# Altium PCB REV11_PCB_DESIGN_LAYOUT.PcbDoc (part 1 of 3)
Units mm, origin at the board's own origin, x right, y up, seen from the top; angles counter-clockwise.
Board outline 97.79 x 93.98 mm, 4 copper layers (L1S-TOP, L2- GND PLANE, L3 - PWR PLANE, L4-BOTTOM), stack 1.636 mm thick; 53 components, 27 nets, 164 pads, 437 vias.
Unrouted connection lines stored in the file: 146.
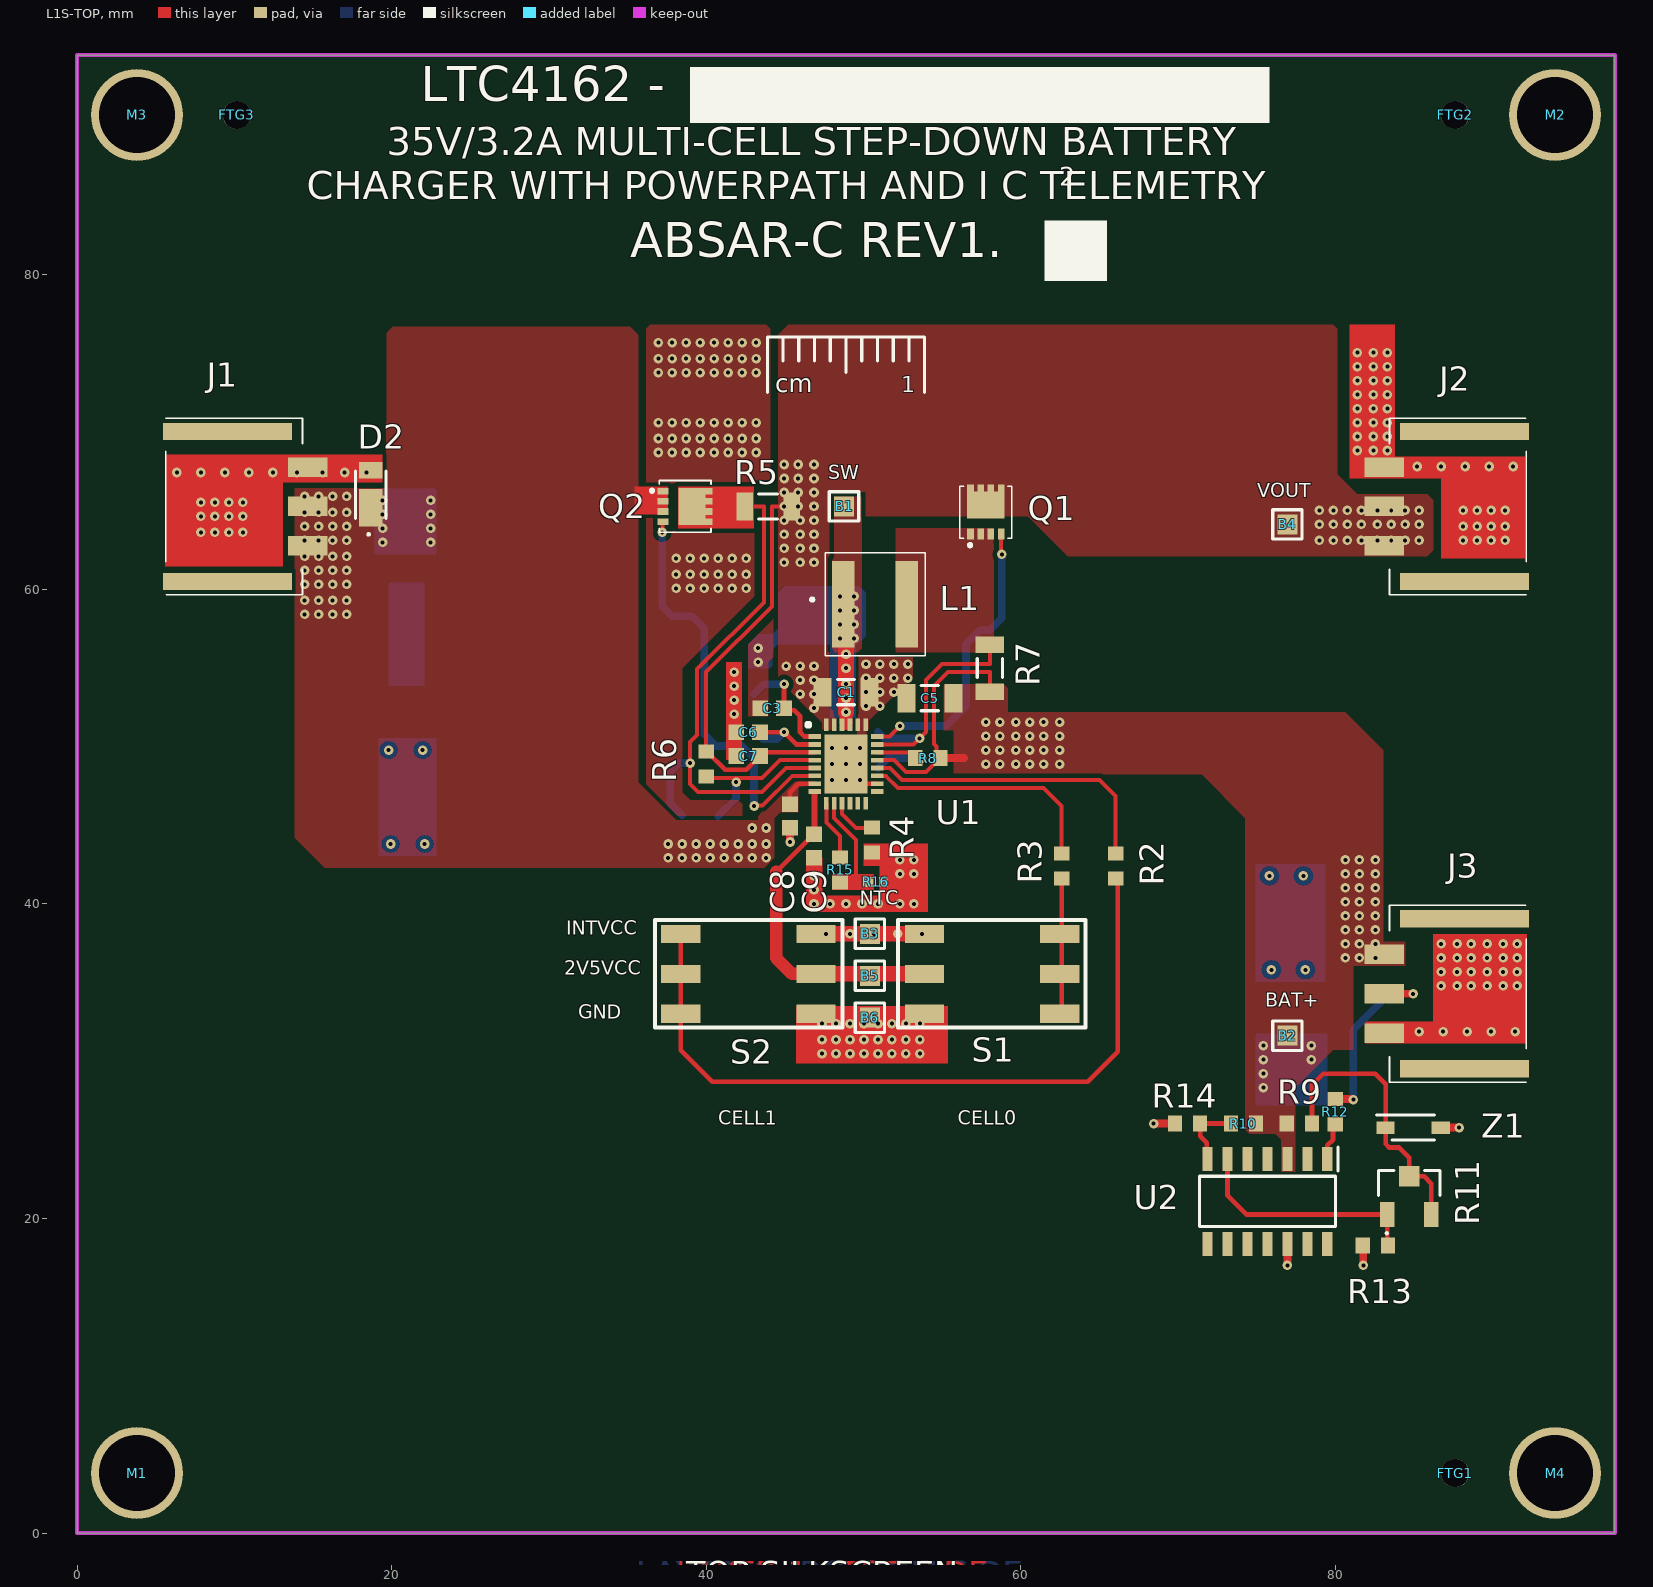
[diagram p0: L1S-TOP view]
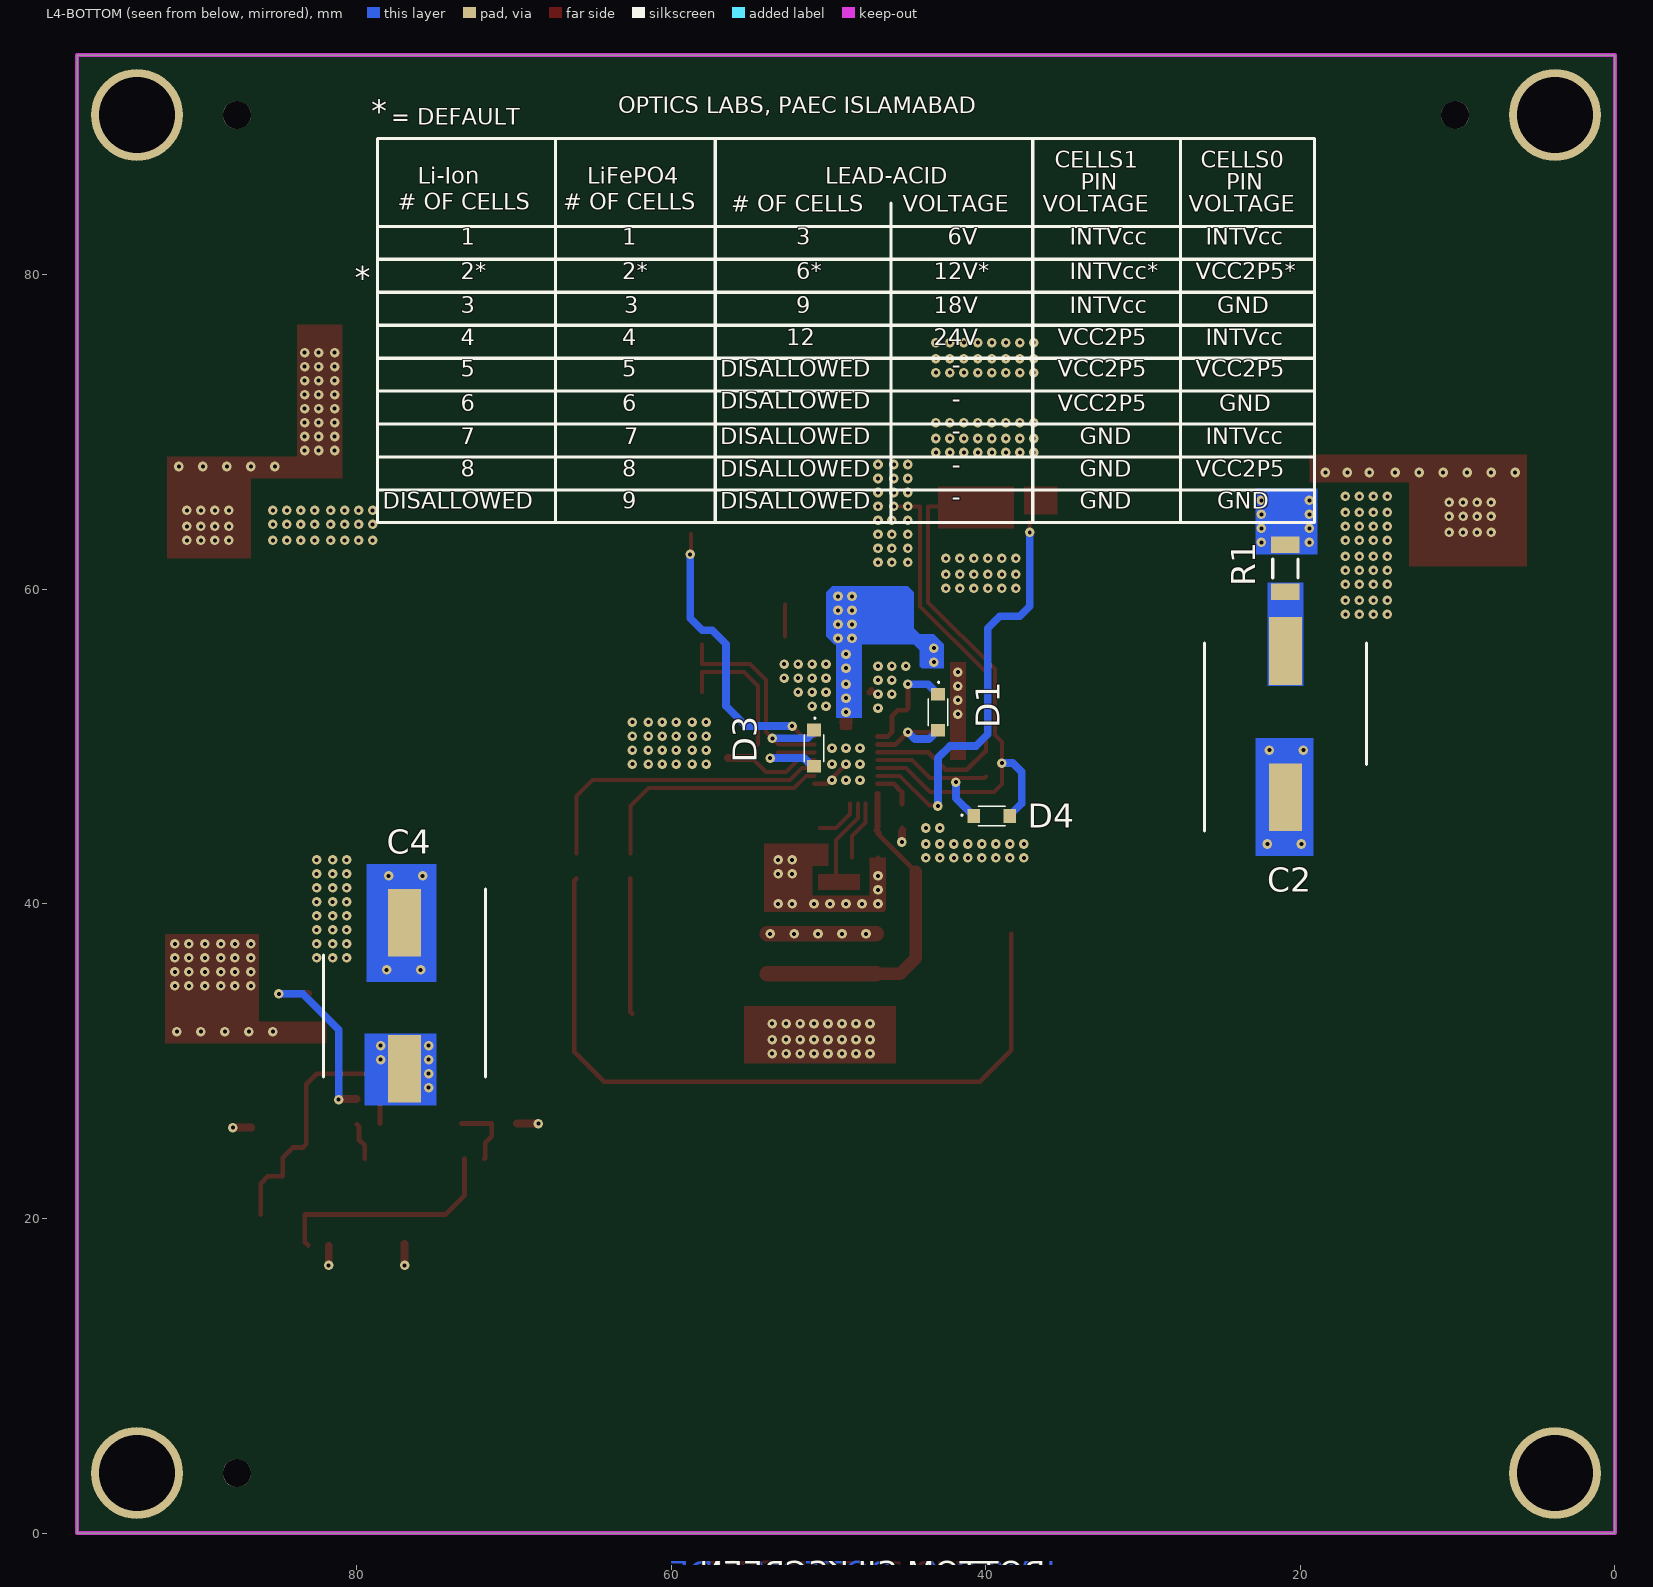
[diagram p1: L4-BOTTOM view, seen from below]
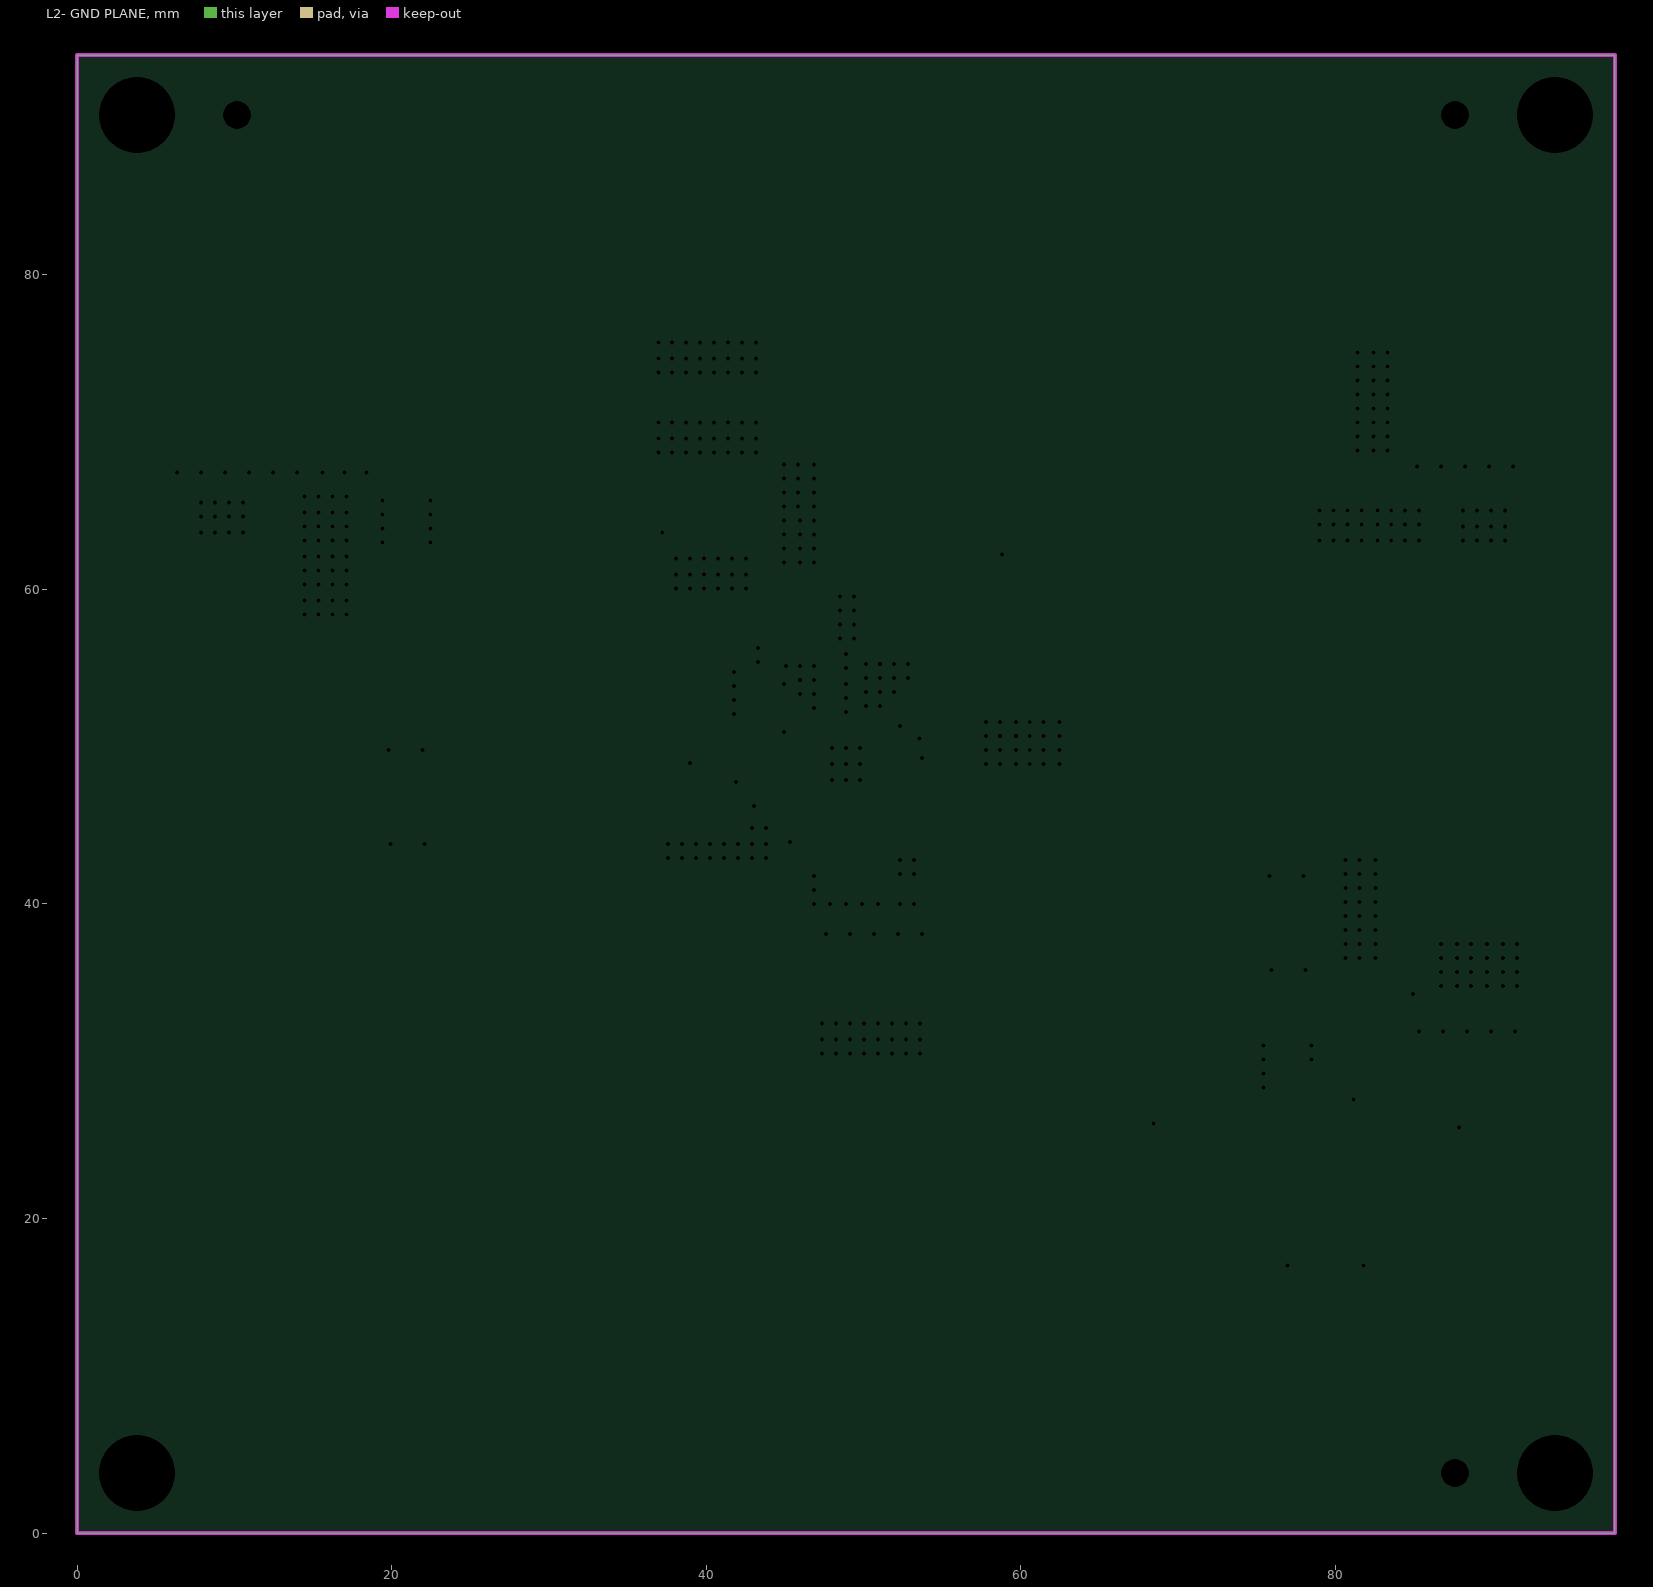
[diagram p2: L2- GND PLANE, clearances drawn from the general rule]
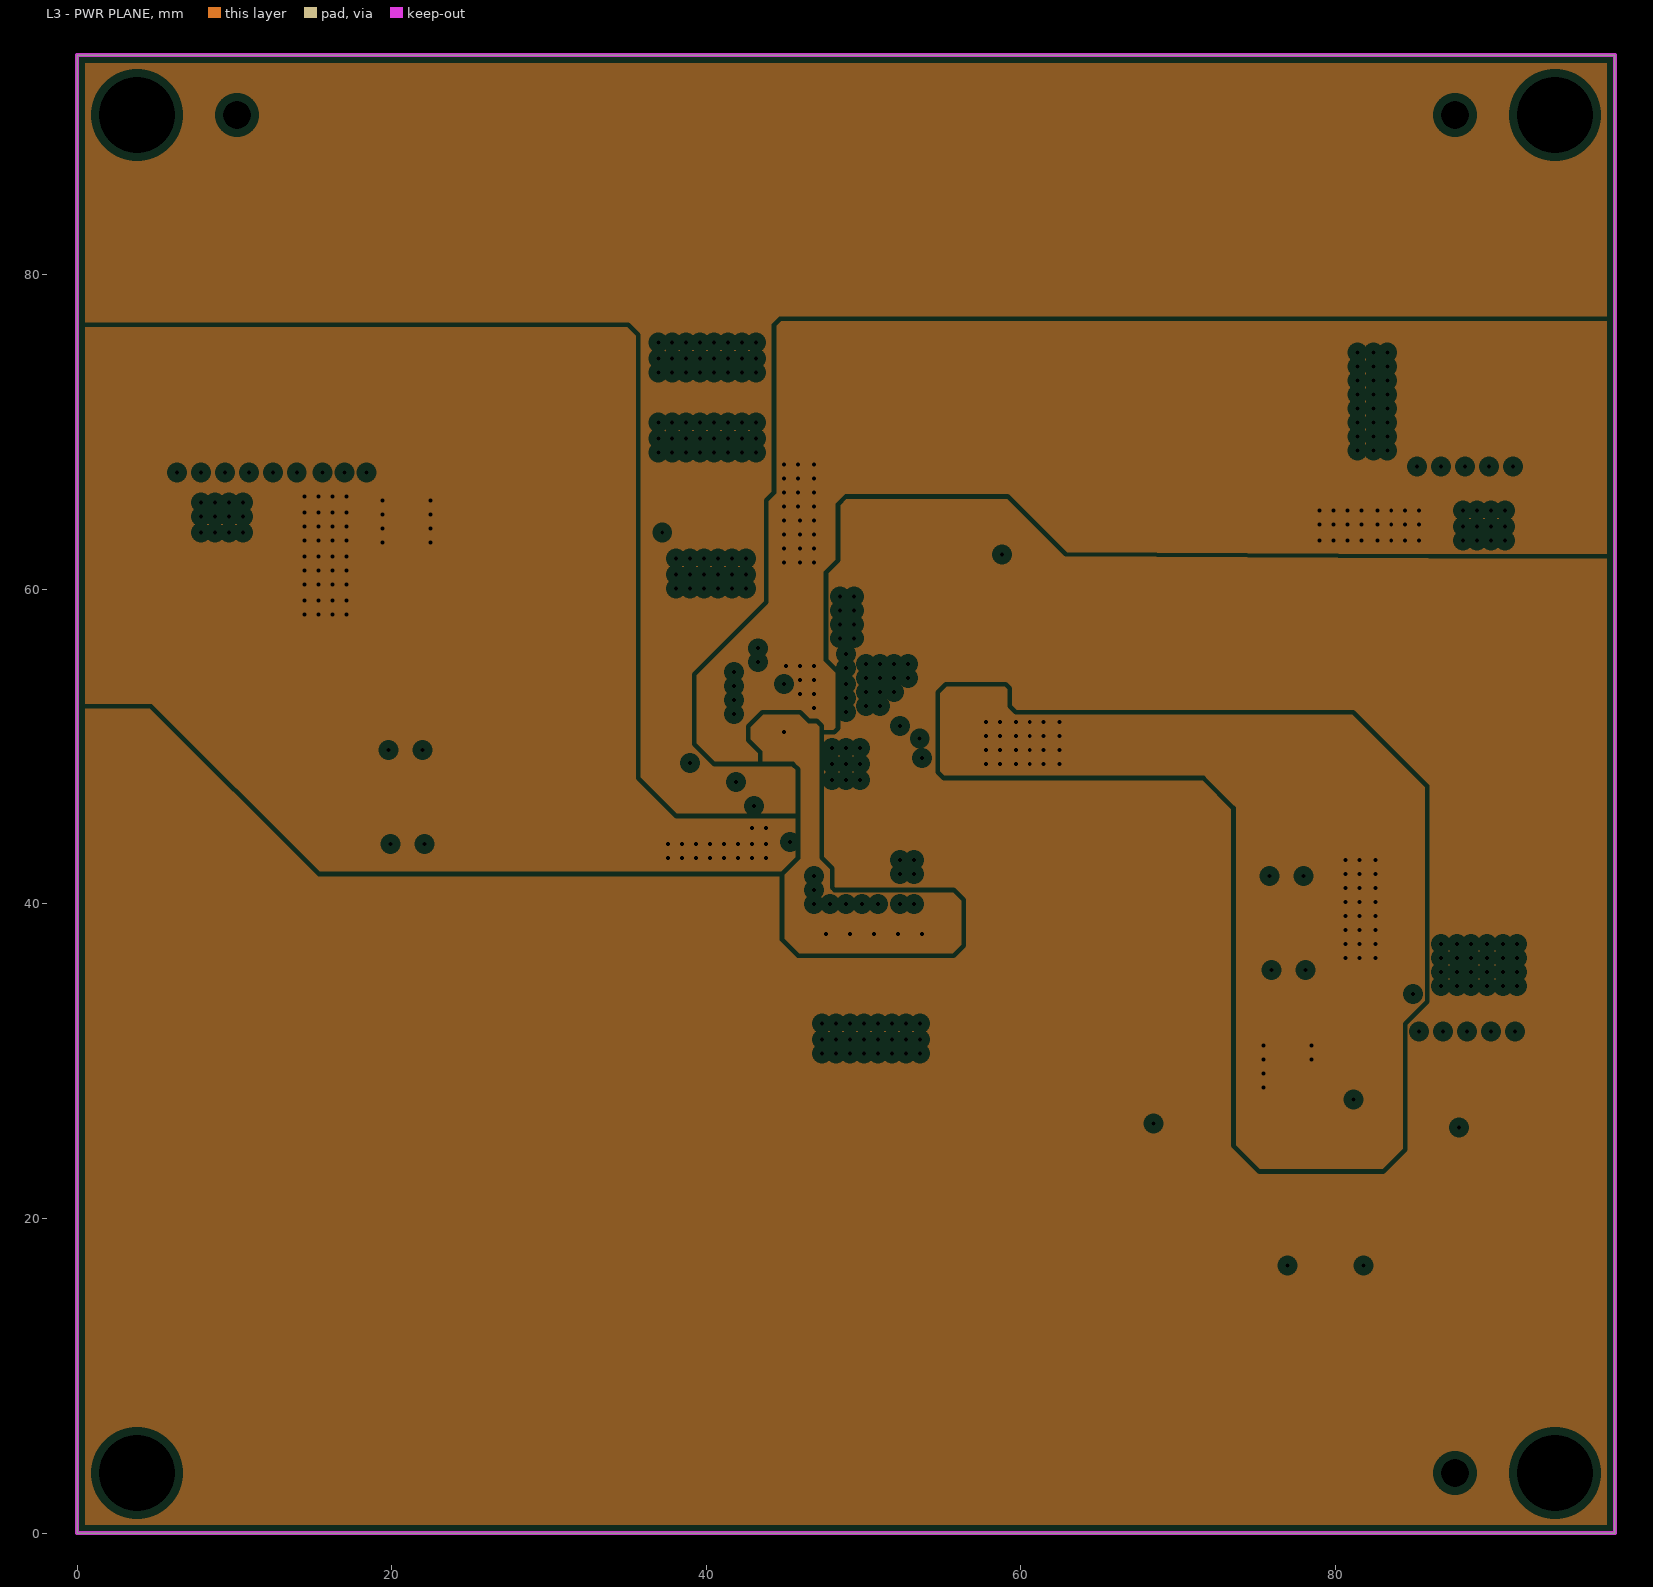
[diagram p3: L3 - PWR PLANE, clearances drawn from the general rule]
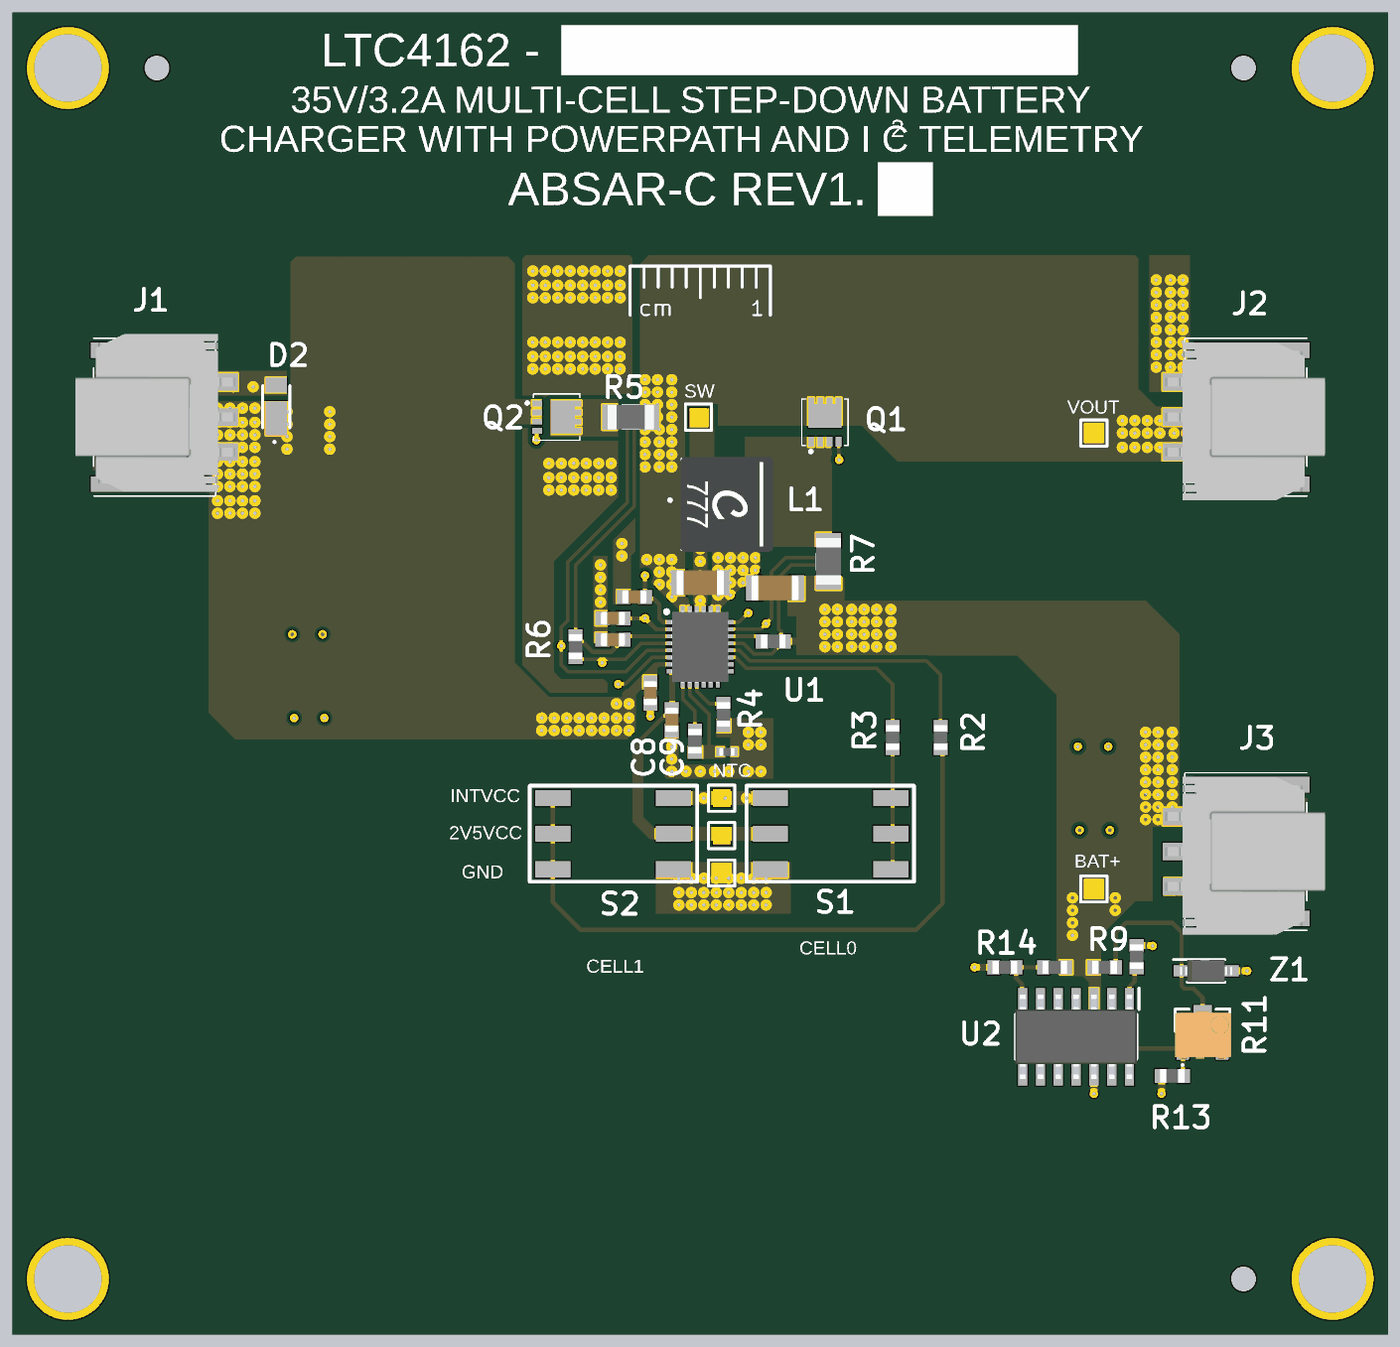
[diagram p5: 3D render of the assembled board from above, using the file's embedded part models]
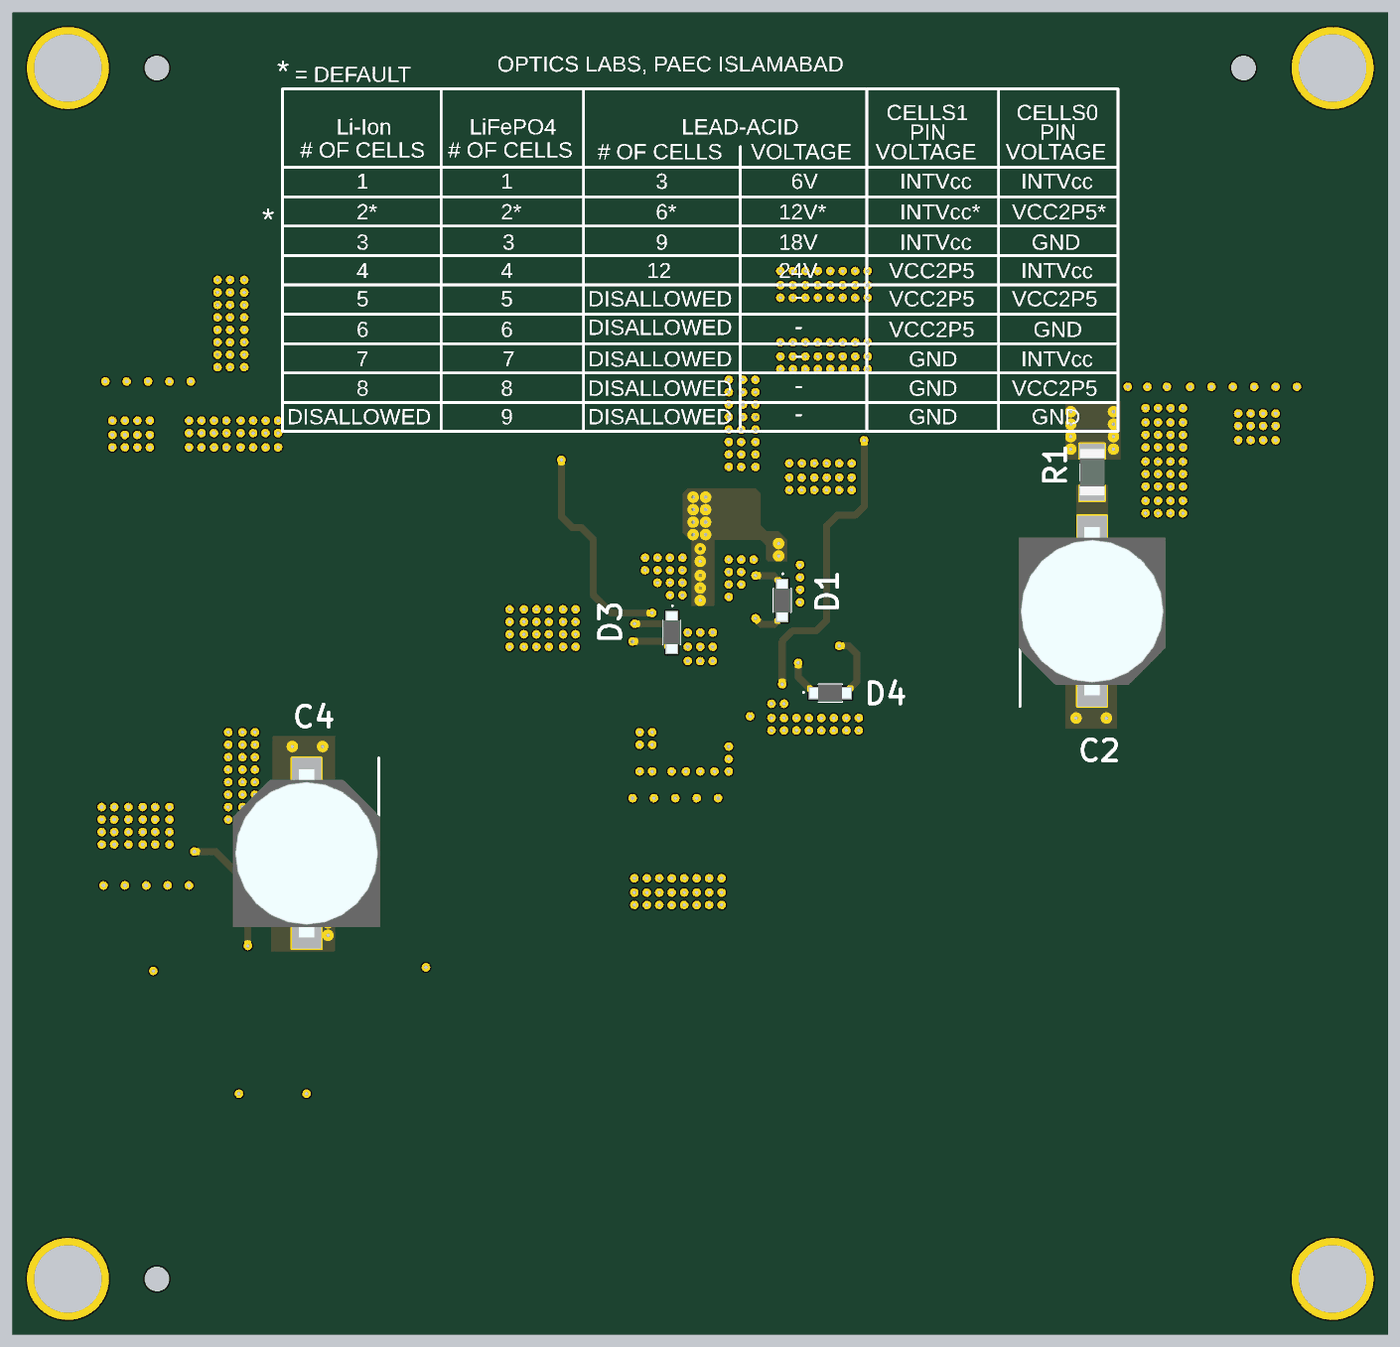
[diagram p6: 3D render of the assembled board from below, using the file's embedded part models]

## Layer stack, top to bottom
L1S-TOP: signal copper 0.035
Prepeg1(Tg=180): prepreg 0.113, FR-4, Dk 4.1
Prepeg2(Tg=180): dielectric 0.065, FR-4, Dk 4.3
L2- GND PLANE: plane copper 0.035, net GND
Core(Tg=170): core 1.14, Core, Dk 4.5
L3 - PWR PLANE: plane copper 0.035
Prepeg3(Tg=180): prepreg 0.065, FR-4, Dk 4.3
Prepeg4(Tg=180): dielectric 0.113, FR-4, Dk 4.1
L4-BOTTOM: signal copper 0.035

## Board outline
0,0 97.79,0 97.79,93.98 0,93.98

## Design rules (kind name [scope] priority, off if disabled: settings)
Clearance "Clearance - Net -CSN" [InNet('CSN')] p1: gap=0.254 ignorepadtopadclearanceinfootprint=FALSE except(0: Arc-Hole Track-Hole SMDPad-Hole THPad-Hole Via-Hole Fill-Hole Poly-Hole Region-Hole Text-Hole; 0.152: Arc-Text Track-Text SMDPad-Text THPad-Text Via-Text Fill-Text Poly-Text Region-Text; 0.2: Arc-Arc Arc-Track Arc-SMDPad Arc-THPad Arc-Via Track-Track Track-SMDPad Track-THPad Track-Via SMDPad-SMDPad SMDPad-THPad SMDPad-Via THPad-THPad THPad-Via)
Clearance "Clearance - Net - VIN" [InNet('VIN')] p2: gap=0.254 ignorepadtopadclearanceinfootprint=FALSE except(0: Arc-Hole Track-Hole SMDPad-Hole THPad-Hole Via-Hole Fill-Hole Poly-Hole Region-Hole Text-Hole; 0.152: Arc-Text Track-Text SMDPad-Text THPad-Text Via-Text Fill-Text Poly-Text Region-Text; 0.2: Arc-Arc Arc-Track Arc-SMDPad Arc-THPad Track-Track Track-SMDPad Track-THPad SMDPad-SMDPad SMDPad-THPad THPad-THPad THPad-Via)
Clearance "Clearance - Default - DEFAULT- SMD" [IsVia vs IsSMTPin] p3: gap=0.254 ignorepadtopadclearanceinfootprint=FALSE
Clearance "Clearance - Default - DEFAULT - Via" [IsVia vs IsVia] p4: gap=0.254 ignorepadtopadclearanceinfootprint=TRUE
Clearance "Clearance - Default - DEFAULT - Net" [All] p5: gap=0.3 ignorepadtopadclearanceinfootprint=FALSE except(0: Arc-Hole Track-Hole SMDPad-Hole THPad-Hole Via-Hole Fill-Hole Poly-Hole Region-Hole Text-Hole; 0.127: Arc-THPad Track-THPad THPad-Via; 0.152: Arc-Text Track-Text SMDPad-Text THPad-Text Via-Text Fill-Text Poly-Text Region-Text; 0.2: Arc-Arc Arc-Track Arc-SMDPad Arc-Via Track-Track Track-SMDPad Track-Via SMDPad-SMDPad SMDPad-THPad SMDPad-Via THPad-THPad Via-Via; 0.254: Text-Text)
ComponentClearance "ComponentClearance - Default - DEFAULT" [All] p1: gap=0.152 collisioncheckmode=3 verticalgap=0.254 showdistances=FALSE
FanoutControl Fanout_Small [(CompPinCount < 5)] p1: bgadir=Out bgaviamode=Centered fanoutstyle=Auto fanoutdirection=OutThenIn viagrid=0.025 // Fanout_Small (Default Rule)
FanoutControl Fanout_BGA [IsBGA] p2: bgadir=Out bgaviamode=Centered fanoutstyle=Auto fanoutdirection=Alternating viagrid=0.025 // Fanout_BGA (Default Rule)
FanoutControl Fanout_LCC [IsLCC] p4: bgadir=Out bgaviamode=Centered fanoutstyle=Auto fanoutdirection=Alternating viagrid=0.025 // Fanout_LCC (Default Rule)
HoleSize [All] p1: absolutevalues=TRUE maxlimit=5 minlimit=0.025 maxpercent=80.000 minpercent=20.000
HoleToHoleClearance "HoleToHoleClearance - Default - DEFAULT" [All] p1: gap=0.152 allowstackedmicrovias=TRUE
Length "Default Length" [All] p1: maxlimit=1270 minlimit=0 usedelayunits=FALSE
MaxMinImpedance "Default Impedance" [All] p1: minimum=50.00 maximum=150.0
MinimumSolderMaskSliver [All] p1: minsoldermaskwidth=0.01
ParallelSegment "Default Parallel Segment Same Layer" [All] p1: limit=25.4 gap=5.08
ParallelSegment "Default Parallel Segment Adjasent" [All] p2: limit=25.4 gap=5.08
PlaneClearance "PlaneClearance - FootPrint 'MTG-8831'" [HasFootprint('MTG-8831')] p1: clearance=1.016 // PAD - Power Plane Clearance
PlaneConnect "Default PlaneConnect" [All] p1: planeconnectstyle=Direct reliefexpansion=0.508 reliefentries=4 reliefconductorwidth=0.381 reliefairgap=0.254
PolygonConnect "PolygonConnect - Default SMT" [IsSMTPin] p1: connectstyle=Direct reliefconductorwidth=0.381 reliefentries=4 polygonreliefangle="45 Angle" airgapwidth=0.254
PolygonConnect "PolygonConnect - FootPrint 'TE-1932788-1'_2" [HasFootprint('TE-1932788-1')] p2: connectstyle=Relief reliefconductorwidth=1 reliefentries=2 polygonreliefangle="90 Angle" airgapwidth=0.2
PolygonConnect "PolygonConnect - FootPrint 'TE-1932788-1'" [HasFootprint('TE-1932788-1')] p3: connectstyle=Relief reliefconductorwidth=1 reliefentries=2 polygonreliefangle="90 Angle" airgapwidth=0.2
PolygonConnect "PolygonConnect - FootPrint 'TE-1932788-1AA'_3" [HasFootprint('TE-1932788-1AA')] p4: connectstyle=Relief reliefconductorwidth=1 reliefentries=2 polygonreliefangle="90 Angle" airgapwidth=0.2
PolygonConnect "PolygonConnect - FootPrint 'TE-1932788-1AA'" [HasFootprint('TE-1932788-1AA')] p5: connectstyle=Relief reliefconductorwidth=1 reliefentries=2 polygonreliefangle="90 Angle" airgapwidth=0.2
PolygonConnect "PolygonConnect - Default Pad" [All] p6: connectstyle=Direct reliefconductorwidth=0.381 reliefentries=4 polygonreliefangle="45 Angle" airgapwidth=0.254
RoomDefinition Designator_BAT_IND [InComponentClass('Designator_BAT_IND')] p1: confinementstyle=ConfineOut formatcopy=TRUE lockcomponents=FALSE outline -239.395,-202.057 -188.595,-202.057 -188.595,-176.657 -239.395,-176.657
RoomDefinition TOP [InComponentClass('TOP')] p2: confinementstyle=ConfineOut formatcopy=TRUE lockcomponents=FALSE outline 122.047,49.657 103.759,49.657 103.759,60.579 103.378,60.96 103.632,61.214 121.539,61.214 121.539,49.911 121.666,49.784
RoomDefinition Designator [InComponentClass('Designator')] p3: confinementstyle=ConfineOut formatcopy=TRUE lockcomponents=FALSE outline 98.933,20.32 151.257,20.32 151.257,32.512 98.933,32.512
RoutingLayers "RoutingLayers - Default - DEFAULT" [All] p1: top layer_v5=TRUE bottom layer_v5=TRUE
RoutingPriority "RoutingPriority - Default - DEFAULT" [All] p1: routingpriority=4
RoutingTopology "Default Routing Topology" [All] p1: topology=Shortest
RoutingVias "RoutingVias - Default - DEFAULT" [All] p1: holewidth=0.254 width=0.61 viastyle="Through Hole" minholewidth=0.254 minwidth=0.61 maxholewidth=0.254 maxwidth=0.61
SMDToCorner "SMDToCorner - Default - DEFAULT" [All] p1: distance=40000
SilkToSolderMaskClearance [IsPad] p1: minsilkscreentomaskgap=0.1 clearancetoexposedcopper=TRUE
SolderMaskExpansion [All] p1: expansion=0.102
Width "Width - Net - Vin" [InNet('Vin')] p1: maxlimit=2.54 minlimit=0.152 preferedwidth=0.305
Width "Width - Net - N17284519" [InNet('N17284519')] p2: maxlimit=2.54 minlimit=0.152 preferedwidth=0.254
Width "Width - NetClass - ClearanceClass_4(RuleSet)" [InNetClass('ClearanceClass_4(RuleSet)')] p3: maxlimit=2.54 minlimit=0.254 preferedwidth=0.305
Width "Width - NetClass - ClearanceClass_3(RuleSet)" [InNetClass('ClearanceClass_3(RuleSet)')] p4: maxlimit=2.54 minlimit=0.152 preferedwidth=0.254
Width "Default Width" [All] p5: maxlimit=2.54 minlimit=0.254 preferedwidth=0.254
17 further rules are at their usual default settings.

## Classes and differential pairs
component class Designator: B1 B2 B3 B4 B5 B6 C1 C2 C3 C4 C5 C6 C7 C8 C9 D1 D2 D3 D4 L1 Q1 Q2 R1 R2 R3 R4 R5 R6 R7 R8 R15 R16 S1 S2 U1
component class TOP: FTG1 FTG2 FTG3 J1 J2 J3 M1 M2 M3 M4
component class Designator_BAT_IND: R9 R10 R11 R12 R13 R14 U2 Z1

## Components (designator, comment, footprint, x,y, rotation, side; value= is the part's Value field where it differs from the comment)
B1 "Family" TPS127 48.768,65.278 r0 top
B2 "Family" TPS127 76.962,31.623 r0 top
B3 "Family" TPS127 50.419,38.1 r0 top
B4 "Family" TPS127 76.962,64.135 r0 top
B5 "Family" TPS127 50.419,35.433 r0 top
B6 "Family" TPS127 50.419,32.766 r0 top
C1 "1206" CAPC3216X152N 48.895,53.467 r180 top value=10uF
C2 "150uF" CAPAE1030X1050N 20.955,51.435 r90 bottom
C3 "Cap" CAPC1608X80N 44.196,52.451 r0 top value=0.022uF
C4 "150uF" CAPAE1030X1050N 76.962,34.163 r270 bottom
C5 "1206" CAPC3216X152N 54.229,53.086 r0 top value=10uF
C6 "Cap" CAPC1608X80N 42.672,50.927 r0 top value=10uF
C7 "Cap" CAPC1608X80N 42.672,49.403 r0 top value=0.1uF
C8 "Cap" CAPC1608X80N 45.339,45.593 r90 top value=0.1uF
C9 "Cap" CAPC1608X80N 46.863,43.688 r90 top value=1uF
D1 "CUS05S40,H3F" 1SS357TPH3F 43.053,52.197 r0 bottom
D2 "DFLT33A-7" POWERDI123_1 18.669,66.014 r270 top
D3 "CUS05S40,H3F" 1SS357TPH3F 50.927,49.911 r0 bottom
D4 "CUS05S40,H3F" 1SS357TPH3F 39.624,45.593 r270 bottom
FTG1 "Use only in PCB" Fudicial 87.63,3.81 r90 top
FTG2 "Use only in PCB" Fudicial 87.63,90.17 r90 top
FTG3 "Use only in PCB" Fudicial 10.16,90.17 r90 top
J1 "1054301103" 1054301103 10.16,65.278 r270 top locked
J2 "1054301103" 1054301103 87.63,65.278 r90 top locked
J3 "1054301103" 1054301103 87.63,34.29 r90 top locked
L1 "XAL6060-682MEB" XAL6060822MEB 50.292,59.055 r0 top
M1 "=Family" MOUNTING_PAD#1 3.556,2.921 r0 top
M2 "=Family" MOUNTING_PAD#2 94.234,90.805 r0 top
M3 "=Family" MOUNTING_PAD#3 4.191,90.678 r0 top
M4 "=Family" MOUNTING_PAD#4 94.488,4.064 r0 top
Q1 "FDMC8327L" FDMC86139P 57.785,64.516 r0 top
Q2 "FDMC8327L" FDMC86139P 38.259,65.278 r270 top
R1 "Res Semi" RESC3216X60N 20.955,61.341 r90 bottom value=2.49R
R2 "Res Semi" RESC1608X55N 66.04,42.418 r270 top value=100K
R3 "Res Semi" RESC1608X55N 62.611,42.418 r270 top value=100K
R4 "Res Semi" RESC1608X55N 50.546,44.069 r90 top value=63.4K
R5 "Res Semi" RESC3216X60N 43.942,65.278 r180 top value=0.01R
R6 "Res Semi" RESC1608X55N 40.005,48.895 r90 top value=10R
R7 "Res Semi" RESC3216X60N 58.039,54.991 r270 top value=0.01R
R8 "Res Semi" RESC1608X55N 54.102,49.276 r180 top value=10R
R9 "Res3" RESC1608X55N 77.724,26.035 r0 top value=4.7K
R10 "Res3" RESC1608X55N 74.168,26.035 r180 top value=49.9K
R11 "RPot" BOURNS_POT 84.709,21.463 r0 top value=10K
R12 "Res3" RESC1608X55N 80.01,26.797 r270 top value=4.7K
R13 "Res3" RESC1608X55N 82.55,18.288 r180 top value=7K
R14 "Res3" RESC1608X55N 70.612,26.035 r180 top value=10K
R15 "Res Semi" RESC1608X55N 48.514,42.164 r90 top value="10K 1%"
R16 "Res Semi" RESC1005X40N 50.8,41.402 r0 top value="10K 1%"
S1 "204-3ST" 204-3ST 62.484,38.1 r270 top
S2 "204-3ST" 204-3ST 38.39,33.02 r90 top
U1 "LTC4162EUFD-L41#PBF" LTC4162-L 48.895,48.895 r0 top locked
U2 "LM139DG4" SOIC127P600X175-14N 75.692,21.082 r270 top
Z1 "MMSZ6V2T1G" SOD3716X135N 84.963,25.781 r0 top

## Footprints (in the part's own frame and the unit in brackets; to place one, negate y for a bottom-side part, rotate by r counter-clockwise, add the part's x,y. Pads: shape width x height; smd on the part's side, far side on the other; paste and mask are expansions set on the pad)
1SS357TPH3F [mm]
  rect 0.9x0.8 smd: 1(0,-1.15) 2(0,1.15)
  silkscreen extent -0.63,-1.95 0.63,0.85, body extent -0.62,-1.47 0.63,1.47, height 1.1
204-3ST [mm]
  rect 1.15x2.5 smd: 1(0,0) 2(2.54,0) 3(5.08,0) 4(5.08,-8.6) 5(2.54,-8.6) 6(0,-8.6)
  silkscreen extent -0.89,-10.29 5.97,1.65, body extent -0.64,-10.16 5.72,1.14, height 8.1
1054301103 [mm]
  rect 1.24x2.5 smd: 1(-2.5,4.515) 2(0,4.515) 3(2.5,4.515)
  rect 1.1x8.2 smd: MP1(-4.77,-0.605) MP2(4.77,-0.605)
  silkscreen extent -5.62,-4.51 5.62,4.18, body extent -5.92,-5.8 5.32,5.63, height 6.95
BOURNS_POT [mm]
  rect 0.9x1.6 smd: 1(-1.4,-1.215) 3(1.4,-1.215)
  rect 1.3x1.3 smd: 2(0,1.215)
  silkscreen extent -1.95,-2.43 1.95,1.59, body extent -1.96,-1.97 2.03,1.47, height 4.32
CAPAE1030X1050N [mm]
  rect 4.3x2.1 smd: 1(-4.65,0) 2(4.65,0)
  silkscreen extent -6.8,-5.15 5.15,5.15, body extent -6,-5.25 6,5.25, height 10.5
CAPC1608X80N [mm] "Chip Capacitor, Body 1.6x0.8mm IPC Medium Density"
  rect 1x1 smd: 1(-0.75,0) 2(0.75,0)
  body extent -0.87,-0.47 0.88,0.48, height 0.8
CAPC3216X152N [mm] "Chip Capacitor, Body 3.2x1.6mm, IPC Medium Density"
  rect 1.15x1.8 smd: 1(-1.5,0) 2(1.5,0)
  silkscreen extent -0.55,-0.8 0.55,0.8, body extent -1.7,-0.9 1.7,0.9, height 1.52
FDMC86139P [mm]
  rect 0.42x0.7 smd: 1(-0.975,-1) 2(-0.325,-1) 3(0.325,-1) 4(0.975,-1)
  rect 0.42x0.45 smd: 5(0.975,1.925) 6(0.325,1.925) 7(-0.325,1.925) 8(-0.975,1.925)
  rect 2.37x1.7 smd: 9(0,0.85)
  silkscreen extent -1.65,-1.8 1.65,2.05, body extent -1.65,-1.21 1.65,1.97, height 0.6
Fudicial [mil]
  round 70 hole 70 unplated: 1(0,0)
LTC4162-L [mm]
  rect 0.8x0.3 smd: 1(-2,1.75) 2(-2,1.25) 3(-2,0.75) 4(-2,0.25) 5(-2,-0.25) 6(-2,-0.75) 7(-2,-1.25) 8(-2,-1.75) 15(2,-1.75) 16(2,-1.25) 17(2,-0.75) 18(2,-0.25) 19(2,0.25) 20(2,0.75) 21(2,1.25) 22(2,1.75)
  rect 0.3x0.8 smd: 9(-1.25,-2.5) 10(-0.75,-2.5) 11(-0.25,-2.5) 12(0.25,-2.5) 13(0.75,-2.5) 14(1.25,-2.5) 23(1.25,2.5) 24(0.75,2.5) 25(0.25,2.5) 26(-0.25,2.5) 27(-0.75,2.5) 28(-1.25,2.5)
  rect 2.75x3.75 smd: 29(0,0)
  silkscreen extent -2.52,2.38 -2.27,2.62, body extent -2.05,-2.55 2.05,2.55, height 0.8
MOUNTING_PAD#1 [mil]
  round 230 hole 190: 1(10,35)
MOUNTING_PAD#2 [mil]
  round 230 hole 190: 1(-10,-25)
MOUNTING_PAD#3 [mil]
  round 230 hole 190: 1(-15,-20)
MOUNTING_PAD#4 [mil]
  round 230 hole 190: 1(-20,-10)
POWERDI123_1 [mm]
  rect 2.4x1.5 smd: 1(0.825,0)
  rect 1.05x1.5 smd: 2(-1.55,0)
  silkscreen extent -1.5,-0.96 2.56,0.96
RESC1005X40N [mm] "Chip Resistor, EIA 0402, Metric 1005, Body 1.0x0.5mm, IPC Medium Density"
  rect 0.58x0.62 smd: 1(-0.47,0) 2(0.47,0)
  body extent -0.52,-0.27 0.53,0.28, height 0.4
RESC1608X55N [mm] "Chip Resistor, EIA 0603, Metric 1608, Body 1.6x0.8mm, IPC Medium Density"
  rect 0.9x1 smd: 1(-0.8,0) 2(0.8,0)
  body extent -0.87,-0.47 0.88,0.48, height 0.55
RESC3216X60N [mm] "Chip Resistor, EIA 1206, Metric 3216, Body 3.2x1.6mm, IPC Medium Density"
  rect 1.05x1.8 smd: 1(-1.5,0) 2(1.5,0)
  silkscreen extent -0.6,-0.8 0.6,0.8, body extent -1.65,-0.87 1.65,0.88, height 0.6
SOD3716X135N [mm]
  rect 1.15x0.8 smd: 1(-1.75,0) 2(1.75,0)
  silkscreen extent -2.32,-0.8 1.35,0.8, body extent -1.86,-0.8 1.86,0.8, height 1.35
SOIC127P600X175-14N [mm]
  rect 1.525x0.65 smd: 1(-2.712,3.81) 2(-2.712,2.54) 3(-2.712,1.27) 4(-2.712,0) 5(-2.712,-1.27) 6(-2.712,-2.54) 7(-2.712,-3.81) 8(2.712,-3.81) 9(2.712,-2.54) 10(2.712,-1.27) 11(2.712,0) 12(2.712,1.27) 13(2.712,2.54) 14(2.712,3.81)
  silkscreen extent -3.47,-4.33 1.6,4.48, body extent -3,-4.33 3,4.33, height 1.75
TPS127 [mm] "1.27 x  1.27mm SMD Test Point Area"
  rect 1.27x1.27 smd paste-1.27: 1(0,0)
  silkscreen extent -0.94,-0.94 0.94,0.94
XAL6060822MEB [mm]
  rect 1.43x5.5 smd: 1(-1.57,0) 2(2.47,0)
  silkscreen extent -3.65,-3.28 3.65,3.28, body extent -2.78,-3.38 3.78,3.38, height 6.1

## Part data
B1 B2 B3 B4 B5 B6: library part "Single SMD Pad (Round)", "Through Hole Pad"
C1 C5: library part Cap, "Capacitor", LatestRevisionDate=17-Jul-2002, LatestRevisionNote="Re-released for DXP Platform.", PackageDescription="Radial Cap, Thru-Hole; 2 Leads; 0.3 in Pin Spacing", PackageReference=RAD-0.3, Published=8-Jun-2000, Publisher="Altium Limited"
C2 C4: library part EEEFK1H151P, "Capacitor Polarised", Manufacturer_Name=Panasonic, Arrow Part Number=EEEFK1H151P, Datasheet Link=http://industrial.panasonic.com/www-cgi/jvcr13pz.cgi?E+PZ+4+ABA0120+EEEFK1H151P+8+WW, Height=10.5mm, Manufacturer_Part_Number=EEEFK1H151P
C3 C6 C7 C8 C9: "Capacitor", LatestRevisionDate=17-Jul-2002, LatestRevisionNote="Re-released for DXP Platform.", PackageDescription="Radial Cap, Thru-Hole; 2 Leads; 0.3 in Pin Spacing", PackageReference=RAD-0.3, Published=8-Jun-2000, Publisher="Altium Limited"
D1 D3 D4: "Schottky Diode", Manufacturer_Name=Toshiba, Mouser Part Number=757-CUS05S40H3F, Arrow Part Number=CUS05S40,H3F, Arrow Price/Stock=https://www.arrow.com/en/products/cus05s40h3f/toshiba, Datasheet Link=http://toshiba.semicon-storage.com/info/docget.jsp?did=14743&prodName=CUS05S40, Height=1mm, Manufacturer_Part_Number=CUS05S40,H3F, Mouser Price/Stock=https://www.mouser.co.uk/ProductDetail/Toshiba/CUS05S40H3F?qs=cW4DzVrAanNdPcmUvyvUwQ%3D%3D
D2: library part DFLT27A-7, "TVS Diode (Uni-directional)", Manufacturer_Name="Diodes Inc.", Mouser Part Number=621-DFLT27A-7, Arrow Part Number=DFLT27A-7, Arrow Price/Stock=https://www.arrow.com/en/products/dflt27a-7/diodes-incorporated, Datasheet Link=https://www.diodes.com/assets/Datasheets/ds30581.pdf, Manufacturer_Part_Number=DFLT27A-7, Mouser Price/Stock=https://www.mouser.co.uk/ProductDetail/Diodes-Incorporated/DFLT27A-7?qs=6ARB0lp6jlVvGDG5Fitq6g%3D%3D
FTG1 FTG2 FTG3: library part "Fiducial Target", "Fiducial Target"
J1 J2 J3: "Connector", Manufacturer_Name=Molex, Mouser Part Number=N/A, Datasheet Link=https://www.molex.com/pdm_docs/sd/1054301103_sd.pdf, Height=7.19mm, Manufacturer_Part_Number=1054301103, Mouser Price/Stock=https://www.mouser.com/Search/Refine.aspx?Keyword=N%2FA
L1: "Inductor", Manufacturer_Name=COILCRAFT, Mouser Part Number=994-XAL6060-682MEB, Arrow Part Number=XAL6060-682MEB, Datasheet Link=http://www.mouser.com/datasheet/2/597/xal60xx-270658.pdf, Height=6mm, Manufacturer_Part_Number=XAL6060-682MEB, Mouser Price/Stock=https://www.mouser.co.uk/ProductDetail/Coilcraft/XAL6060-682MEB?qs=VJjuEbE9QBMHcYJ9tsk61Q%3D%3D
M1 M2 M3 M4: library part "Through Hole Pad", "Through Hole Pad"
Q1 Q2: "MOSFET (N-Channel)", Manufacturer_Name="ON Semiconductor", Mouser Part Number=512-FDMC8327L, Arrow Part Number=FDMC8327L, Arrow Price/Stock=https://www.arrow.com/en/products/fdmc8327l/on-semiconductor, Datasheet Link=https://www.onsemi.com/pub/Collateral/FDMC8327L-D.pdf, Manufacturer_Part_Number=FDMC8327L, Mouser Price/Stock=https://www.mouser.co.uk/ProductDetail/ON-Semiconductor-Fairchild/FDMC8327L?qs=WCuZTSj0%252BHDvMqCYzCnZnA%3D%3D
R1 R2 R3 R4 R5 R6 R7 R8 R15 R16: "Semiconductor Resistor", LatestRevisionDate=17-Jul-2002, LatestRevisionNote="Re-released for DXP Platform.", PackageDescription="Axial Device, Thru-Hole; 2 Leads; 0.5 in Pin Spacing", PackageReference=AXIAL-0.5, Published=8-Jun-2000, Publisher="Altium Limited"
R9 R10 R12 R13 R14: "Resistor", LatestRevisionDate=29-May-2009, LatestRevisionNote="IPC-7351 Footprint Added.", PackageDescription="Chip Resistor", PackageReference=J1-0603, Published=8-Jun-2000, Publisher="Altium Limited"
R11: "Potentiometer", LatestRevisionDate=17-Jul-2002, LatestRevisionNote="Re-released for DXP Platform.", PackageDescription="Variable Resistor, Thru-Hole; 3 Leads", PackageReference=VR5, Published=8-Jun-2000, Publisher="Altium Limited", Set Position=0.5, Sim Note="Enter the Resistance value and the set point into parameter fields."
S1 S2: library part "SW DIP-3", "DIP Switch, 3 Position, SPST", Code_JEDEC=MO-001-AM, LatestRevisionDate=17-Jul-2002, LatestRevisionNote="Re-released for DXP Platform.", PackageReference=DIP-6, Published=24-Mar-1999, Publisher="Altium Limited"
U1: "Integrated Circuit", Manufacturer_Name="Analog Devices", Mouser Part Number=584-4162EUFDL41PB, Arrow Part Number=LTC4162EUFD-L41#PBF, Arrow Price/Stock=https://www.arrow.com/en/products/ltc4162eufd-l41pbf/analog-devices, Datasheet Link=https://www.analog.com/media/en/technical-documentation/data-sheets/ltc4162-l.pdf, Height=0.8mm, Manufacturer_Part_Number=LTC4162EUFD-L41#PBF, Mouser Price/Stock=https://www.mouser.com/Search/Refine.aspx?Keyword=584-4162EUFDL41PB
U2: "Integrated Circuit", Manufacturer_Name="Texas Instruments", Mouser Part Number=595-LM139DG4, Arrow Part Number=LM139DG4, Arrow Price/Stock=https://www.arrow.com/en/products/lm139dg4/texas-instruments, Datasheet Link=http://www.ti.com/lit/gpn/lm139, Height=1.75mm, Manufacturer_Part_Number=LM139DG4, Mouser Price/Stock=https://www.mouser.co.uk/ProductDetail/Texas-Instruments/LM139DG4?qs=pZC5fsuWujF2%252BfnPhylc7Q%3D%3D
Z1: "Zener Diode", Manufacturer_Name="ON Semiconductor", Mouser Part Number=863-MMSZ6V2T1G, Arrow Part Number=MMSZ6V2T1G, Arrow Price/Stock=https://www.arrow.com/en/products/mmsz6v2t1g/on-semiconductor, Datasheet Link=http://www.onsemi.com/pub/Collateral/MMSZ2V4T1-D.PDF, Height=1.35mm, Manufacturer_Part_Number=MMSZ6V2T1G, Mouser Price/Stock=https://www.mouser.com/Search/Refine.aspx?Keyword=863-MMSZ6V2T1G

## Via types
v1: diameter 0.61, hole 0.254, L1S-TOP to L4-BOTTOM, 437 vias

## Nets (pads, with @x,y where several pads share a name; then routed paths per layer and width w, separated by ;. In a path a pad name is that pad's centre, name@x,y a point inside that pad or via, vN(x,y) a via of type N, cw(c..) or ccw(c..) an arc to the next point about the centre after c; other vN are vias at no path point)
2V5Vcc: B5.1 C9.2 S1.5 S2.5 U1.8 | length 21.4
  L1S-TOP w0.3: 44.45,42.037 46.863,44.45 C9.2@46.863,44.692 ; C9.2@46.768,44.533 C9.2@46.863,44.438 ; C9.2@46.863,44.565 C9.2@46.99,44.692
  L1S-TOP w0.4: C9.2@46.895,44.914 46.895,46.99
  L1S-TOP w0.8: 44.45,42.037 44.45,36.576 45.466,35.56 S2.5@46.99,35.56
  L1S-TOP w1: S2.5@46.99,35.56 S1.5@53.884,35.56
BAT+: B2.1 C4.2 C5.2 J3.3 R7.2 R8.1 R9.1 R10.1 U1.19 U2.3 | length 15.8
  L1S-TOP w0.254: U1.19@50.895,49.145 51.947,49.145 52.705,48.387 53.975,48.387 R8.1@54.883,49.295 ; R8.1@54.648,49.403 54.648,50 54.483,50.165 54.483,53.848 55.372,54.737 58.039,54.737 R7.2@58.039,53.491
  L1S-TOP w0.5: R8.1@54.902,49.276 56.388,49.276
  other v1: 75.438,28.321 75.438,29.21 75.438,30.099 78.486,30.099 75.438,30.988 78.486,30.988 80.645,36.576 81.534,36.576 82.55,36.576 80.645,37.465 81.534,37.465 82.55,37.465 80.645,38.354 81.534,38.354 82.55,38.354 80.645,39.243 81.534,39.243 82.55,39.243 80.645,40.132 81.534,40.132 82.55,40.132 80.645,41.021 81.534,41.021 82.55,41.021 80.645,41.91 81.534,41.91 82.55,41.91 80.645,42.799 81.534,42.799 82.55,42.799 57.785,48.895 58.674,48.895 59.69,48.895 60.579,48.895 61.468,48.895 62.484,48.895 57.785,49.784 58.674,49.784 59.69,49.784 60.579,49.784 61.468,49.784 62.484,49.784 57.785,50.673 58.674,50.673 59.69,50.673 60.579,50.673 61.468,50.673 62.484,50.673 57.785,51.562 58.674,51.562 59.69,51.562 60.579,51.562 61.468,51.562 62.484,51.562
BATFET: Q1.4 U1.22 | length 18.7
  L1S-TOP w0.254: U1.22@50.895,50.645 51.661,50.645 v1(52.324,51.308) ; Q1.4@58.76,63.516 58.76,62.271 v1(58.801,62.23)
  L4-BOTTOM w0.5: v1(52.324,51.308) 55.245,51.308 56.515,52.578 56.515,56.515 57.404,57.404 58.039,57.404 58.801,58.166 v1(58.801,62.23)
CELLS0: R3.2 S1.1 S1.2 S1.3 | length 8.7
  L1S-TOP w0.3: S1.3@62.484,33.02 62.611,33.147 R3.2@62.611,41.618
CELLS1: R2.2 S2.1 S2.2 S2.3 | length 47.9
  L1S-TOP w0.3: S2.3@38.39,38.1 S2.2@38.39,35.56 S2.1@38.39,33.02 38.39,30.698 40.386,28.702 64.262,28.702 66.167,30.607 66.167,41.491 R2.2@66.04,41.618
CLN: D4.1 R6.1 U1.4 | length 10
  L1S-TOP w0.254: R6.1@40.005,48.095 40.094,48.006 43.561,48.006 44.7,49.145 U1.4@46.895,49.145
  L4-BOTTOM w0.5: D4.1@40.774,45.593 41.91,46.729 v1(41.91,47.752)
CLP: D4.2 Q2.5 Q2.6 Q2.7 Q2.8 Q2.9 R5.2 U1.5 | length 34.2
  L1S-TOP w0.254: R5.2@42.442,65.278 43.688,65.278 43.688,59.182 39.433,54.927 39.433,50.736 38.989,50.292 38.989,47.625 39.497,47.117 43.561,47.117 45.089,48.645 U1.5@46.895,48.645
  L4-BOTTOM w0.4: D4.2@38.474,45.593 D4.2@38.474,45.643
  L4-BOTTOM w0.5: D4.2@38.474,45.643 37.719,46.398 37.719,48.387 38.291,48.959 v1(38.989,48.959)
CSN: D3.2 R8.2 U1.20 | length 5.4
  L1S-TOP w0.254: U1.20@50.895,49.645 R8.2@53.213,49.645
  L4-BOTTOM w0.5: D3.2@50.927,48.634 51.569,49.276 v1(53.721,49.276)
CSP: D3.1 L1.2 Q1.1 Q1.2 Q1.3 R7.1 U1.21 | length 17.3
  L1S-TOP w0.254: U1.21@50.895,50.145 53.193,50.145 v1(53.584,50.536) 53.975,50.927 53.975,54.229 54.991,55.245 58.039,55.245 R7.1@58.039,56.491 ; L1.2@52.762,57.02 L1.2@52.762,59.055
  L4-BOTTOM w0.5: D3.1@50.927,50.934 51.325,50.536 v1(53.584,50.536)
GND: B6.1 C1.1 C2.1 C4.1 C5.1 C6.1 C7.1 C8.1 C9.1 D2.2 J1.1 J2.3 J3.1 R4.1 R13.2 R14.2 R16.2 S1.4 S2.6 U1.16 U1.23 U1.24 U1.29 U2.12 Z1.2 | length 16.8
  L1S-TOP w0.3: C8.1@45.339,44.589 45.212,44.716 C8.1@45.339,44.843 ; v1(46.863,41.783) C9.1@46.863,42.938 ; v1(48.895,48.895) 48.895,48.87 50.12,47.645 U1.16@50.895,47.645 ; R13.2@81.75,18.288 R13.2@81.788,18.25
  L1S-TOP w0.5: v1(45.339,43.942) C8.1@45.339,44.589 ; v1(68.453,26.035) R14.2@69.812,26.035 ; v1(76.962,17.018) U2.12@76.962,18.37 ; v1(81.788,17.018) R13.2@81.788,18.25 ; Z1.2@86.713,25.781 v1(87.884,25.781)
  L1S-TOP w1: S2.6@46.99,33.02 S1.4@53.884,33.02
  other v1: 47.371,30.48 48.26,30.48 49.149,30.48 50.038,30.48 50.927,30.48 51.816,30.48 52.705,30.48 53.594,30.48 47.371,31.369 48.26,31.369 49.149,31.369 50.038,31.369 50.927,31.369 51.816,31.369 52.705,31.369 53.594,31.369 85.344,31.877 86.868,31.877 88.392,31.877 89.916,31.877 91.44,31.877 47.371,32.385 48.26,32.385 49.149,32.385 50.038,32.385 50.927,32.385 51.816,32.385 52.705,32.385 53.594,32.385 86.741,34.798 87.757,34.798 88.646,34.798 89.662,34.798 90.678,34.798 91.567,34.798 86.741,35.687 87.757,35.687 88.646,35.687 89.662,35.687 90.678,35.687 91.567,35.687 75.946,35.814 78.105,35.814 86.741,36.576 87.757,36.576 88.646,36.576 89.662,36.576 90.678,36.576 91.567,36.576 86.741,37.465 87.757,37.465 88.646,37.465 89.662,37.465 90.678,37.465 91.567,37.465 46.863,40.005 47.879,40.005 48.895,40.005 49.911,40.005 50.927,40.005 52.324,40.005 53.213,40.005 46.863,40.894 75.819,41.783 77.978,41.783 52.324,41.91 53.213,41.91 52.324,42.799 53.213,42.799 19.939,43.815 22.098,43.815 48.006,47.879 48.895,47.879 49.784,47.879 48.006,48.895 49.784,48.895 19.812,49.784 21.971,49.784 48.006,49.911 48.895,49.911 49.784,49.911 41.783,52.07 50.165,52.578 51.054,52.578 41.783,52.959 50.165,53.467 51.054,53.467 51.943,53.467 41.783,53.848 50.165,54.356 51.054,54.356 51.943,54.356 52.832,54.356 41.783,54.737 50.165,55.245 51.054,55.245 51.943,55.245 52.832,55.245 38.1,60.071 38.989,60.071 39.878,60.071 40.767,60.071 41.656,60.071 42.545,60.071 38.1,60.96 38.989,60.96 39.878,60.96 40.767,60.96 41.656,60.96 42.545,60.96 38.1,61.976 38.989,61.976 39.878,61.976 40.767,61.976 41.656,61.976 42.545,61.976 88.138,63.119 89.027,63.119 89.916,63.119 90.805,63.119 7.874,63.627 8.763,63.627 9.652,63.627 10.541,63.627 88.138,64.008 89.027,64.008 89.916,64.008 90.805,64.008 7.874,64.643 8.763,64.643 9.652,64.643 10.541,64.643 88.138,65.024 89.027,65.024 89.916,65.024 90.805,65.024 7.874,65.532 8.763,65.532 9.652,65.532 10.541,65.532 6.35,67.437 7.874,67.437 9.398,67.437 10.922,67.437 12.446,67.437 13.97,67.437 15.621,67.437 17.018,67.437 18.415,67.437 85.217,67.818 86.741,67.818 88.265,67.818 89.789,67.818 91.313,67.818 36.957,68.707 37.846,68.707 38.735,68.707 39.624,68.707 40.513,68.707 41.402,68.707 42.291,68.707 43.18,68.707 81.407,68.834 82.423,68.834 83.312,68.834 36.957,69.596 37.846,69.596 38.735,69.596 39.624,69.596 40.513,69.596 41.402,69.596 42.291,69.596 43.18,69.596 81.407,69.723 82.423,69.723 83.312,69.723 36.957,70.612 37.846,70.612 38.735,70.612 39.624,70.612 40.513,70.612 41.402,70.612 42.291,70.612 43.18,70.612 81.407,70.612 82.423,70.612 83.312,70.612 81.407,71.501 82.423,71.501 83.312,71.501 81.407,72.39 82.423,72.39 83.312,72.39 81.407,73.279 82.423,73.279 83.312,73.279 36.957,73.787 37.846,73.787 38.735,73.787 39.624,73.787 40.513,73.787 41.402,73.787 42.291,73.787 43.18,73.787 81.407,74.168 82.423,74.168 83.312,74.168 36.957,74.676 37.846,74.676 38.735,74.676 39.624,74.676 40.513,74.676 41.402,74.676 42.291,74.676 43.18,74.676 81.407,75.057 82.423,75.057 83.312,75.057 36.957,75.692 37.846,75.692 38.735,75.692 39.624,75.692 40.513,75.692 41.402,75.692 42.291,75.692 43.18,75.692
INFET: Q2.4 U1.6 | length 26.9
  L1S-TOP w0.254: v1(37.211,63.627) 37.235,63.651 37.235,64.279 Q2.4@37.259,64.303 ; v1(43.053,46.228) 43.079,46.254 43.587,46.254 45.478,48.145 U1.6@46.895,48.145
  L4-BOTTOM w0.5: v1(37.211,63.627) 37.211,58.928 37.846,58.293 39.116,58.293 39.878,57.531 39.878,50.8 40.64,50.038 42.291,50.038 43.053,49.276 v1(43.053,46.228)
INTVCC: B3.1 C6.2 D1.2 S1.6 S2.4 U1.2 | length 13
  L1S-TOP w0.3: C6.2@43.422,50.927 v1(44.958,50.927) 45.74,50.145 U1.2@46.895,50.145
  L1S-TOP w1: S2.4@46.99,38.1 B3.1@50.419,38.1 S1.6@53.884,38.1
  L4-BOTTOM w0.5: D1.2@43.053,51.047 43.617,50.482 44.514,50.482 v1(44.958,50.927)
  other v1: 47.625,38.1 49.149,38.1 50.673,38.1 52.197,38.1 53.721,38.1
LED: J3.2 R12.1 | length 12.2
  L1S-TOP w0.3: v1@81.115,27.597 v1(81.153,27.559)
  L1S-TOP w0.5: R12.1@80.01,27.597 v1@81.115,27.597 ; J3.2@83.115,34.29 v1(84.963,34.29)
  L4-BOTTOM w0.5: v1(81.153,27.559) 81.153,32.004 83.439,34.29 v1(84.963,34.29)
NetC2_2: C2.2 R1.1
NetC3_2: C3.2 D1.1 U1.1 | length 7
  L1S-TOP w0.3: v1(44.958,53.975) 44.946,53.963 C3.2@44.946,52.451 45.073,52.324 45.593,52.324 45.974,51.943 45.974,50.927 46.256,50.645 U1.1@46.895,50.645
  L4-BOTTOM w0.5: D1.1@43.053,53.347 43.681,53.975 v1(44.958,53.975)
NetR2_1: R2.1 U1.18 | length 19.5
  L1S-TOP w0.254: U1.18@50.895,48.645 51.685,48.645 52.451,47.879 65.024,47.879 66.04,46.863 R2.1@66.04,43.218
NetR3_1: R3.1 U1.17 | length 15.5
  L1S-TOP w0.254: U1.17@50.895,48.145 51.423,48.145 52.197,47.371 61.468,47.371 62.611,46.228 R3.1@62.611,43.218
NetR4_2: R4.2 U1.11 | length 2.9
  L1S-TOP w0.254: U1.11@48.645,46.395 48.645,45.716 49.53,44.831 R4.2@50.546,44.831
NetR9_2: R9.2 R11.2 R11.3 Z1.1 | length 18.1
  L1S-TOP w0.3: R9.2@78.524,26.035 78.524,28.486 79.248,29.21 82.55,29.21 83.213,28.547 Z1.1@83.213,25.781 83.213,24.737 83.439,24.511 84.074,24.511 84.709,23.876 R11.2@84.709,22.678 85.653,22.678 86.109,22.222 R11.3@86.109,20.248
NetR10_2: R10.2 R14.1 U2.7 | length 4.4
  L1S-TOP w0.3: U2.7@71.882,23.794 71.839,23.837 71.839,24.808 71.412,25.235 R14.1@71.412,26.035 R10.2@73.368,26.035
NetR11_1: R11.1 R13.1 U2.6 | length 15
  L1S-TOP w0.3: U2.6@73.152,23.794 73.152,21.463 74.367,20.248 R11.1@83.309,20.248 83.309,18.501 R13.1@83.096,18.288
NetR12_2: R12.2 U2.1 | length 2.4
  L1S-TOP w0.3: U2.1@79.502,23.794 79.502,24.658 79.863,25.019 79.863,25.85 R12.2@80.01,25.997
NTC: R15.1 R16.1 U1.10 | length 7.4
  L1S-TOP w0.254: U1.10@48.145,46.395 48.145,45.454 49.53,44.069 49.53,41.516 49.378,41.364
  L1S-TOP w0.5: R15.1@48.514,41.364 49.378,41.364 R16.1@50.241,41.364
NTCBIAS: R15.2 U1.9 | length 3.8
  L1S-TOP w0.254: U1.9@47.645,46.395 47.645,45.192 48.514,44.323 R15.2@48.514,42.964
SW: B1.1 C3.1 L1.1 U1.25 U1.26 | length 6.7
  L1S-TOP w0.254: U1.26@48.645,51.206 U1.26@48.645,51.384 ; U1.25@49.145,51.206 U1.25@49.145,51.397
  L1S-TOP w0.3: U1.26@48.645,51.206 U1.25@49.145,51.206
  L1S-TOP w0.8: 48.895,51.562 v1(48.895,52.197)
  L1S-TOP w1.016: v1(48.895,52.197) L1.1@48.895,57.379
  other v1: 48.895,53.086 48.895,53.975 48.895,54.991 43.307,55.372 48.895,55.88 43.307,56.261 48.514,56.896 49.403,56.896 48.514,57.785 49.403,57.785 48.514,58.674 49.403,58.674 48.514,59.563 49.403,59.563
VIN: C8.2 D2.1 J1.2 J1.3 Q2.1 Q2.2 Q2.3 R1.2 U1.7 | length 2.5
  L1S-TOP w0.3: C8.2@45.339,46.343 45.339,47.117 45.867,47.645 U1.7@46.895,47.645
  other v1: 37.592,42.926 38.481,42.926 39.37,42.926 40.259,42.926 41.148,42.926 42.037,42.926 42.926,42.926 43.815,42.926 37.592,43.815 38.481,43.815 39.37,43.815 40.259,43.815 41.148,43.815 42.037,43.815 42.926,43.815 43.815,43.815 42.926,44.831 43.815,44.831 14.478,58.42 15.367,58.42 16.256,58.42 17.145,58.42 14.478,59.309 15.367,59.309 16.256,59.309 17.145,59.309 14.478,60.325 15.367,60.325 16.256,60.325 17.145,60.325 14.478,61.214 15.367,61.214 16.256,61.214 17.145,61.214 14.478,62.103 15.367,62.103 16.256,62.103 17.145,62.103 19.431,62.992 22.479,62.992 14.478,63.119 15.367,63.119 16.256,63.119 17.145,63.119 19.431,63.881 22.479,63.881 14.478,64.008 15.367,64.008 16.256,64.008 17.145,64.008 19.431,64.77 22.479,64.77 14.478,64.897 15.367,64.897 16.256,64.897 17.145,64.897 19.431,65.659 22.479,65.659 14.478,65.913 15.367,65.913 16.256,65.913 17.145,65.913
VOUT: B4.1 C1.2 C7.2 J2.1 J2.2 Q1.5 Q1.6 Q1.7 Q1.8 Q1.9 R5.1 R6.2 U1.3 U1.27 U1.28 | length 26.6
  L1S-TOP w0.254: R6.2@40.005,49.695 40.005,54.737 44.196,58.928 44.196,65.278 R5.1@45.442,65.278
  L1S-TOP w0.3: R6.2@40.005,49.695 40.055,49.695 41.224,48.526 42.545,48.526 C7.2@43.422,49.403 43.664,49.645 U1.3@46.895,49.645
  L1S-TOP w0.4: C1.2@47.268,53.594 C1.2@47.395,53.467
  other v1: 46.863,52.451 45.974,53.34 46.863,53.34 45.974,54.229 46.863,54.229 45.085,55.118 45.974,55.118 46.863,55.118 44.958,61.722 45.974,61.722 46.863,61.722 44.958,62.611 45.974,62.611 46.863,62.611 78.994,63.119 79.883,63.119 80.772,63.119 81.661,63.119 82.677,63.119 83.566,63.119 84.455,63.119 85.344,63.119 44.958,63.5 45.974,63.5 46.863,63.5 78.994,64.135 79.883,64.135 80.772,64.135 81.661,64.135 82.677,64.135 83.566,64.135 84.455,64.135 85.344,64.135 44.958,64.389 45.974,64.389 46.863,64.389 78.994,65.024 79.883,65.024 80.772,65.024 81.661,65.024 82.677,65.024 83.566,65.024 84.455,65.024 85.344,65.024 44.958,65.278 45.847,65.278 46.863,65.278 44.958,66.167 45.847,66.167 46.863,66.167 44.958,67.056 45.847,67.056 46.863,67.056 44.958,67.945 45.847,67.945 46.863,67.945
pads on no net: FTG1.1 FTG2.1 FTG3.1 J1.MP1 J1.MP2 J2.MP1 J2.MP2 J3.MP1 J3.MP2 M1.1 M2.1 M3.1 M4.1 U1.12 U1.13 U1.14 U1.15 U2.2 U2.4 U2.5 U2.8 U2.9 U2.10 U2.11 U2.13 U2.14

## Polygon pours and split planes (outlines as drawn)
BAT+ on L1S-TOP (solid, pour order 26): 58.928,53.975 59.182,53.721 59.182,52.197 56.896,52.197 55.753,51.054 55.118,51.054 55.118,53.975
SW on L1S-TOP "L1-TOP-SW" (solid, remove dead copper, pour order 2): 43.942,51.943 43.942,55.372 44.577,56.007 49.657,56.007 49.911,56.261 49.911,66.421 47.625,66.421 47.625,61.468 42.672,56.515 42.672,51.943
GND on L1S-TOP "L1-TOP-GND" (solid, pour order 24): 43.815,76.835 44.069,76.581 44.069,66.929 43.053,66.929 43.053,59.563 38.481,54.991 38.481,50.546 38.481,47.117 38.989,46.609 42.037,46.609 42.291,46.355 42.291,45.339 38.1,45.339 36.195,47.244 36.195,76.581 36.449,76.835
VIN on L1S-TOP "L1-TOP-VIN" (solid, pour order 6): 19.685,76.327 20.066,76.708 35.179,76.708 35.687,76.2 35.687,47.752 38.1,45.339 43.307,45.339 43.307,45.593 45.593,47.879 47.244,47.879 47.244,47.498 45.974,47.498 45.847,47.371 45.847,45.847 44.704,45.847 44.323,45.466 44.323,42.926 43.688,42.291 15.748,42.291 13.843,44.196 13.843,58.801 13.843,64.516 13.843,66.421 19.673,66.421 19.673,70.6 19.685,70.612
BAT+ on L1S-TOP "L1-TOP-BAT+" (solid, pour order 22): 59.182,52.197 56.896,52.197 55.753,51.054 55.753,48.26 71.501,48.26 74.295,45.466 74.295,25.654 74.549,25.4 76.2,25.4 76.581,25.019 76.581,22.987 77.47,22.987 77.47,28.321 79.883,30.734 81.153,30.734 81.153,36.068 84.455,36.068 84.455,37.592 83.058,37.592 83.058,49.784 80.645,52.197
GND on L1S-TOP "L1-TOP-GND 1" (solid, pour order 20): 49.53,50.673 49.53,55.759 53.148,55.747 53.148,54.432 50.354,51.638 50.354,50.673
CSP on L1S-TOP "L1-TOP-CSP" (solid, pour order 12): 58.293,63.881 58.293,61.595 58.293,56.007 52.07,56.007 52.07,56.388 52.07,63.881
VOUT on L1S-TOP "L1-TOP-N17284475" (solid, remove dead copper, pour order 0): 47.833,62.405 47.833,66.213 50.119,66.213 50.165,66.167 50.165,64.643 60.452,64.643 62.992,62.103 85.852,62.103 86.233,62.484 86.233,65.659 85.852,66.04 81.407,66.04 80.137,67.31 80.137,76.581 79.883,76.835 45.212,76.835 44.577,76.2 44.577,54.305 47.371,51.511 47.371,50.927 48.387,50.927 48.387,51.943 47.833,52.497
GND on L2- GND PLANE (split plane): 97.026,0.764 0.764,0.764 0.764,93.216 97.026,93.216
no net on L3 - PWR PLANE (split plane): 62.758,62.123 62.773,62.111 62.789,62.099 62.807,62.092 62.825,62.084 62.826,62.084 62.845,62.081 62.864,62.079 85.978,61.952 85.979,61.952 97.28,61.952 97.28,0.51 0.51,0.51 0.51,52.427 4.636,52.427 15.26,41.803 15.291,41.779 15.328,41.764 15.367,41.759 44.68,41.759 44.68,37.719 44.685,37.68 44.7,37.643 44.724,37.612 45.74,36.596 45.771,36.572 45.808,36.557 45.847,36.552 55.753,36.552 55.792,36.557 55.829,36.572 55.86,36.596 56.495,37.231 56.519,37.262 56.534,37.299 56.539,37.338 56.539,40.259 56.534,40.298 56.519,40.335 56.495,40.366 55.86,41.001 55.829,41.025 55.792,41.04 55.753,41.045 48.229,41.045 48.174,41.1 48.174,42.274 48.169,42.313 48.154,42.35 48.13,42.381 47.502,43.009 47.502,48.998 47.537,49.003 47.574,49.018 47.605,49.042 47.629,49.073 47.644,49.11 47.649,49.149 47.649,49.657 47.644,49.696 47.629,49.733 47.605,49.764 47.574,49.788 47.537,49.803 47.502,49.808 47.502,50.776 48.133,50.776 48.172,50.781 48.209,50.796 48.24,50.82 48.494,51.074 48.518,51.105 48.533,51.142 48.538,51.181 48.538,54.737 48.533,54.776 48.518,54.813 48.494,54.844 47.776,55.562 47.776,61.024 48.494,61.742 48.518,61.773 48.533,61.81 48.538,61.849 48.538,65.342 48.958,65.762 59.119,65.762
VIN on L3 - PWR PLANE (split plane): 35.536,76.137 35.536,63.373 35.536,48.006 35.541,47.967 35.556,47.93 35.58,47.899 37.993,45.486 38.024,45.462 38.061,45.447 38.1,45.442 45.696,45.442 45.696,42.989 44.768,42.061 15.43,42.061 4.806,52.685 4.775,52.709 4.738,52.724 4.699,52.729 0.51,52.729 0.51,76.684 19.05,76.684 34.989,76.684
no net on L3 - PWR PLANE (split plane): 97.28,77.367 44.704,77.367 44.665,77.362 44.628,77.347 44.597,77.323 44.216,76.942 44.192,76.911 44.177,76.874 44.172,76.835 44.172,66.23 43.708,65.766 43.684,65.735 43.669,65.698 43.664,65.659 43.664,59.245 39.136,54.717 39.112,54.686 39.097,54.649 39.092,54.61 39.092,50.165 39.097,50.126 39.112,50.089 39.136,50.058 40.406,48.788 40.437,48.764 40.474,48.749 40.513,48.744 45.459,48.744 45.696,48.507 45.696,45.744 38.163,45.744 35.838,48.069 35.838,63.373 35.838,76.2 35.833,76.239 35.818,76.276 35.794,76.307 35.159,76.942 35.128,76.966 35.091,76.981 35.052,76.986 19.05,76.986 0.51,76.986 0.51,93.47 97.28,93.47
BAT+ on L3 - PWR PLANE (split plane): 59.158,53.658 59.158,52.578 59.163,52.539 59.178,52.502 59.202,52.471 59.583,52.09 59.614,52.066 59.651,52.051 59.69,52.046 81.09,52.046 85.701,47.435 85.701,41.529 85.701,33.845 84.348,32.492 84.324,32.461 84.309,32.424 84.304,32.385 84.304,24.447 82.995,23.138 75.247,23.138 73.684,24.701 73.684,46.101 73.679,46.14 73.664,46.177 73.64,46.208 71.735,48.113 71.704,48.137 71.667,48.152 71.628,48.157 55.181,48.157 54.888,48.45 54.888,53.404 55.308,53.824 58.992,53.824
INTVCC on L3 - PWR PLANE (split plane): 46.426,51.531 46.458,51.507 46.494,51.492 46.533,51.486 46.979,51.486 47.2,51.265 47.2,42.946 47.205,42.907 47.214,42.885 47.22,42.87 47.244,42.839 47.871,42.212 47.871,41.038 47.877,40.999 47.885,40.977 47.892,40.962 47.916,40.931 48.059,40.787 48.091,40.763 48.127,40.748 48.166,40.743 55.69,40.743 56.237,40.196 56.237,37.401 55.69,36.854 45.91,36.854 44.982,37.782 44.982,41.847 45.954,42.819 45.978,42.85 45.993,42.887 45.998,42.926 45.998,48.569 45.993,48.609 45.984,48.63 45.978,48.645 45.954,48.676 45.628,49.002 45.597,49.026 45.582,49.032 45.561,49.041 45.521,49.046 43.585,49.046 43.585,49.657 43.58,49.696 43.565,49.733 43.541,49.764 43.16,50.145 42.823,50.482 42.823,51.245 43.16,51.582 43.624,52.046 45.911,52.046
VOUT on L3 - PWR PLANE (split plane): 97.28,62.254 85.979,62.254 62.928,62.381 59.289,66.02 59.258,66.044 59.221,66.059 59.182,66.064 48.895,66.064 48.856,66.059 48.819,66.044 48.788,66.02 48.28,65.512 48.256,65.481 48.241,65.444 48.236,65.405 48.236,61.912 47.518,61.194 47.494,61.163 47.479,61.126 47.474,61.087 47.474,55.499 47.479,55.46 47.494,55.423 47.518,55.392 48.236,54.674 48.236,51.244 48.07,51.078 47.502,51.078 47.502,51.328 47.497,51.367 47.482,51.404 47.458,51.435 47.148,51.745 47.117,51.769 47.081,51.784 47.041,51.789 46.596,51.789 46.081,52.304 46.05,52.328 46.013,52.343 45.974,52.348 43.561,52.348 43.522,52.343 43.485,52.328 43.454,52.304 42.946,51.796 42.565,51.415 42.541,51.384 42.526,51.347 42.521,51.308 42.521,50.419 42.526,50.38 42.541,50.343 42.565,50.312 42.946,49.931 43.283,49.594 43.283,49.046 40.576,49.046 39.394,50.228 39.394,54.547 43.922,59.075 43.946,59.106 43.961,59.143 43.966,59.182 43.966,65.596 44.43,66.06 44.454,66.091 44.469,66.128 44.474,66.167 44.474,76.772 44.767,77.065 97.28,77.065

## Keep-outs
Keep-Out Layer:
  the board outline again, w0.254

## Other copper
L1S-TOP:
  rectangle net NTC: 48.006,40.894 50.673,41.91
  rectangle net GND: 45.72,29.845 55.372,33.528
  rectangle net VIN: 35.433,64.77 37.592,66.548
  rectangle net CLP: 38.227,63.881 43.053,66.548
  rectangle net GND: 5.588,61.468 13.081,67.056
  rectangle net GND: 86.233,32.258 92.202,38.1
  rectangle net GND: 80.899,68.326 83.82,76.835
  rectangle net GND: 86.741,61.976 92.075,67.31
  rectangle net GND: 41.275,49.149 42.291,55.372
  region net GND: 19.431,68.58 5.588,68.58 5.588,66.802 19.431,66.802
  rectangle net GND: 80.899,67.056 92.075,68.453
  rectangle net GND: 81.915,31.115 92.202,32.512
  region net GND: 47.371,42.938 47.371,40.513 51.054,40.513 51.054,41.719 54.038,41.719 54.102,41.783 54.102,39.497 46.482,39.497 46.355,39.624 46.355,42.938
  region net GND: 50.038,43.815 54.102,43.815 54.102,41.021 51.054,41.021 51.054,42.418 50.038,42.418
  text "LAYER 1 - TOP SIDE" at 38.1,-3.81 h2.54
L4-BOTTOM:
  rectangle net SW: 47.879,51.816 49.53,56.642
  rectangle net BAT+: 74.93,27.178 79.502,31.75
  rectangle net GND: 74.93,35.052 79.375,42.545
  rectangle net VIN: 18.923,62.23 22.86,66.421
  rectangle net GND: 19.177,43.053 22.86,50.546
  rectangle net NetC2_2: 19.812,53.848 22.098,60.452
  region net SW: 44.069,54.991 44.196,55.118 44.196,56.134 44.577,56.515 49.657,56.515 50.165,57.023 50.165,59.817 49.784,60.198 44.958,60.198 44.577,59.817 44.577,57.531 44.196,57.15 43.307,57.15 42.672,56.515 42.672,54.991
  text "LAYER 4 - BOTTOM SIDE" at 35.56,-3.81 h2.54
L2- GND PLANE (plane layer: these items are gaps in the copper):
  region: 97.79,0 0,0 0,93.98 97.79,93.98 hole: 97.155,93.345 0.635,93.345 0.635,0.635 97.155,0.635
  lines w0.254: 0.635,19.685 0.635,0.635 ; 14.605,0.635 0.635,0.635 ; 0.635,0.635 97.155,0.635 97.155,93.345 0.635,93.345 0.635,0.635
  text "LAYER 2 - GND PLANE" at 36.83,-3.81 h2.54
L3 - PWR PLANE (plane layer: these items are gaps in the copper):
  lines w0.3: 0,52.578 4.699,52.578 15.367,41.91 44.831,41.91 ; 0,76.835 19.05,76.835 35.052,76.835 35.687,76.2 35.687,63.373 35.687,48.006 38.1,45.593 45.72,45.593 ; 43.053,50.038 43.434,49.657 ; 47.371,50.927 48.133,50.927 48.387,51.181 48.387,54.737 47.625,55.499 47.625,61.087 48.387,61.849 48.387,65.405 48.895,65.913 59.182,65.913 62.865,62.23 85.979,62.103 97.79,62.103 ; 47.498,49.149 47.498,49.657 ; 97.536,77.216 44.704,77.216 44.323,76.835 44.323,66.167 43.815,65.659 43.815,59.182 39.243,54.61 39.243,50.165 40.513,48.895 43.434,48.895 ; 43.434,48.895 45.521,48.895 45.847,48.569 45.847,42.926 44.831,41.91 ; 43.434,48.895 43.434,49.657 ; 43.434,49.657 42.672,50.419 42.672,51.308 43.053,51.689 43.561,52.197 45.974,52.197 46.533,51.638 47.041,51.638 47.351,51.328 47.351,42.946 48.023,42.274 48.023,41.038 48.166,40.894 50.673,40.894 55.753,40.894 56.388,40.259 56.388,37.338 55.753,36.703 45.847,36.703 44.831,37.719 44.831,41.91 ; 54.737,48.387 54.737,53.467 55.245,53.975 59.055,53.975 59.309,53.721 59.309,52.578 59.69,52.197 81.153,52.197 85.852,47.498 85.852,41.529 85.852,33.782 84.455,32.385 84.455,24.384 83.058,22.987 75.184,22.987 73.533,24.638 73.533,46.101 71.628,48.006 55.118,48.006 54.737,48.387
  text "LAYER 3 - PWR PLANE" at 36.83,-3.81 h2.54

## Silkscreen, mask and mechanical layers (free items; w line width, h text height)
Silkscreen Top:
  region: 38.989,93.218 75.819,93.218 75.819,89.662 38.989,89.662 38.989,93.218
  region: 61.531,83.439 65.468,83.439 65.468,79.629 61.531,79.629 61.531,83.439
  lines w0.203: 43.895,72.545 43.895,76.045 53.895,76.045 53.895,72.545 ; 44.895,74.545 44.895,76.045 ; 45.895,74.545 45.895,76.045 ; 46.895,74.545 46.895,76.045 ; 47.895,74.545 47.895,76.045 ; 48.895,73.795 48.895,76.045 ; 49.895,74.545 49.895,76.045 ; 50.895,74.545 50.895,76.045 ; 51.895,74.545 51.895,76.045 ; 52.895,74.545 52.895,76.045
  text "LTC4162 -" at 21.844,90.297 h3.81
  text "35V/3.2A MULTI-CELL STEP-DOWN BATTERY" at 19.685,86.995 h3.05
  text "2" at 62.459,85.242 h2.03
  text "CHARGER WITH POWERPATH AND I C TELEMETRY" at 14.605,84.201 h3.05
  text "ABSAR-C REV1." at 35.179,80.391 h3.81
  text "cm" at 44.395,72.545 h1.14
  text "1" at 52.395,72.545 h1.02
  text "SW" at 47.752,66.675 h1.52
  text "VOUT" at 75.057,65.532 h1.52
  text "NTC" at 49.784,39.624 h1.52
  text "INTVCC" at 31.115,37.719 h1.52
  text "2V5VCC" at 30.988,35.179 h1.52
  text "BAT+" at 75.565,33.147 h1.52
  text "GND" at 31.877,32.385 h1.52
  text "CELL1" at 40.767,25.654 h1.52
  text "CELL0" at 56.007,25.654 h1.52
  text "TOP SILKSCREEN" at 38.735,-3.81 h2.54
Silkscreen Bottom:
  lines w0.203: 19.113,68.418 78.569,68.418 ; 19.113,70.514 78.569,70.514 ; 19.113,72.609 78.569,72.609 ; 19.113,74.705 78.569,74.705 ; 19.113,76.8 78.569,76.8 ; 19.113,78.896 78.569,78.896 ; 19.113,83.087 78.569,83.087 ; 19.241,66.323 78.569,66.323 ; 19.241,80.991 78.569,80.991 ; 27.622,64.262 27.622,88.617 ; 37.02,64.262 37.02,88.675 ; 46.038,64.262 46.038,84.553 ; 57.213,64.262 57.213,88.617 ; 67.373,64.262 67.373,88.675 ; 78.569,64.262 19.113,64.262 ; 19.113,64.262 19.113,88.675 78.676,88.675 78.676,64.262 19.113,64.262
  text "OPTICS LABS, PAEC ISLAMABAD" at 63.373,89.916 h1.78
  text "= DEFAULT" at 77.807,89.183 h1.78
  text "*" at 79.077,89.183 h2.54
  text "CELLS0" at 26.352,86.458 h1.78
  text "CELLS1" at 35.623,86.458 h1.78
  text "LEAD-ACID" at 50.228,85.442 h1.78
  text "LiFePO4" at 65.341,85.442 h1.78
  text "Li-Ion" at 76.136,85.442 h1.78
  text "PIN" at 24.701,85.061 h1.78
  text "PIN" at 33.972,85.061 h1.78
  text "# OF CELLS" at 66.865,83.791 h1.78
  text "# OF CELLS" at 77.406,83.791 h1.78
  text "VOLTAGE" at 27.114,83.664 h1.78
  text "VOLTAGE" at 36.386,83.664 h1.78
  text "VOLTAGE" at 45.276,83.664 h1.78
  text "# OF CELLS" at 56.197,83.664 h1.78
  text "INTVcc" at 26.035,81.559 h1.78
  text "INTVcc" at 34.671,81.559 h1.78
  text "6V" at 42.418,81.559 h1.78
  text "3" at 52.07,81.559 h1.78
  text "1" at 63.119,81.559 h1.78
  text "1" at 73.406,81.559 h1.78
  text "VCC2P5*" at 26.67,79.375 h1.78
  text "INTVcc*" at 34.671,79.375 h1.78
  text "12V*" at 43.307,79.375 h1.78
  text "6*" at 52.07,79.375 h1.78
  text "2*" at 63.119,79.375 h1.78
  text "2*" at 73.406,79.375 h1.78
  text "*" at 80.137,78.613 h2.54
  text "GND" at 25.273,77.216 h1.78
  text "INTVcc" at 34.671,77.216 h1.78
  text "18V" at 43.307,77.216 h1.78
  text "9" at 52.07,77.216 h1.78
  text "3" at 62.992,77.216 h1.78
  text "3" at 73.406,77.216 h1.78
  text "INTVcc" at 26.035,75.184 h1.78
  text "VCC2P5" at 35.433,75.184 h1.78
  text "24V" at 43.307,75.184 h1.78
  text "12" at 52.705,75.184 h1.78
  text "4" at 63.119,75.184 h1.78
  text "4" at 73.406,75.184 h1.78
  text "-" at 42.164,73.304 h2.03
  text "VCC2P5" at 26.67,73.177 h1.78
  text "VCC2P5" at 35.433,73.177 h1.78
  text "DISALLOWED" at 56.896,73.177 h1.78
  text "5" at 63.119,73.177 h1.78
  text "5" at 73.406,73.177 h1.78
  text "-" at 42.164,71.145 h2.03
  text "DISALLOWED" at 56.896,71.145 h1.78
  text "GND" at 25.146,70.993 h1.78
  text "VCC2P5" at 35.433,70.993 h1.78
  text "6" at 63.119,70.993 h1.78
  text "6" at 73.406,70.993 h1.78
  text "-" at 42.164,69.113 h2.03
  text "INTVcc" at 26.035,68.885 h1.78
  text "GND" at 34.036,68.885 h1.78
  text "DISALLOWED" at 56.896,68.885 h1.78
  text "7" at 62.992,68.885 h1.78
  text "7" at 73.406,68.885 h1.78
  text "-" at 42.164,66.929 h2.03
  text "VCC2P5" at 26.67,66.802 h1.78
  text "GND" at 34.036,66.802 h1.78
  text "DISALLOWED" at 56.896,66.802 h1.78
  text "8" at 63.119,66.802 h1.78
  text "8" at 73.406,66.802 h1.78
  text "-" at 42.164,64.922 h2.03
  text "GND" at 25.273,64.77 h1.78
  text "GND" at 34.036,64.77 h1.78
  text "DISALLOWED" at 56.896,64.77 h1.78
  text "9" at 63.119,64.77 h1.78
  text "DISALLOWED" at 78.359,64.77 h1.78
  text "BOTTOM SILKSCREEN" at 36.195,-3.81 h2.54
Paste Mask Top:
  text "TOP SOLDER PASTE" at 37.465,-3.81 h2.54
Paste Mask Bottom:
  text "BOTTOM SOLDER PASTE" at 34.925,-3.81 h2.54
Solder Mask Top:
  text "TOP SOLDER MASK" at 38.1,-3.81 h2.54
Solder Mask Bottom:
  text "BOTTOM SOLDER MASK" at 35.56,-3.81 h2.54
Assembly Drawing Top:
  drawing of 301 lines, arcs and shapes, not listed
  text "REVISION HISTORY" at 190.221,98.501 h3.05
  text "9A" at 90.144,97.786 h1.27
  text "ECO" at 170.815,94.742 h2.54
  text "REV" at 176.911,94.742 h2.54
  text "DESCRIPTION" at 187.96,94.615 h2.54
  text "APPR" at 211.201,94.615 h2.54
  text "DATE" at 223.266,94.615 h2.54
  text "PRODUCTION FAB" at 185.674,91.44 h2.54
  text "ZP" at 212.725,91.44 h2.54
  text "10-09-18" at 221.742,91.44 h2.54
  text "-" at 172.949,91.389 h2.54
  text "11" at 177.546,91.313 h2.54
  text "DETAIL \"A\"" at 105.355,89.15 h1.91
  text "NOTES: UNLESS OTHERWISE SPECIFIED" at 146.05,83.82 h3.81
  text "9B" at 102.74,80.899 h1.27
  text "1. WORKMANSHIP SHALL BE IN ACCORDANCE WITH IPC-A-610." at 133.985,78.74 h2.54
  text "2. ASSEMBLY PROCESS SHALL INCLUDE: REFLOW SOLDER TOP SIDE SMD." at 133.985,75.565 h2.54
  text "MAXIMUM SOLDER TEMPERATURE IS 240 DEGREES CELCIUS." at 136.525,73.025 h2.54
  text "3. PARTS TO OMIT WILL BE SPECIFIED ON THE BILL OF MATERIALS" at 133.985,69.215 h2.54
  text "LOCATIONS OF OMITTED PARTS SHALL BE FREE OF SOLDER." at 136.525,66.675 h2.54
  text "DETAIL \"B\"" at 107.573,64.279 h1.91
  text "MASK THE SOLDER STENCIL WHERE SMT PARTS ARE OMITTED." at 136.525,64.135 h2.54
  text "4. INSTALL SHUNTS AS SHOWN ON ASSY DRAWING." at 133.985,60.96 h2.54
  text "5. DEPANELIZE BOARDS AFTER ASSEMBLY AND ROUTE-OUT THE BREAKOUT" at 133.985,57.15 h2.54
  text "TABS ON FOUR SIDES OF THE BOARD EDGE." at 135.255,54.61 h2.54
  text "6. APPLY ASSEMBLY STAMP OR QA STAMP TO BOTTOM OF BOARD (UNSHOWY AREA)." at 133.985,50.8 h2.54
  text "7. APPLY S/N AT AREA ON BOTTOM SIDE AS SHOWN ON SHEET 2." at 133.985,46.99 h2.54
  text "8. INSTALL TURRETS AND 4 STAND-OFFS AT FOUR CORNERS AS SHOWN BELOW:" at 133.985,43.18 h2.54
  text "DETAIL \"B\"" at 200.025,33.655 h3.05
  text "DETAIL \"A\"" at 147.314,33.608 h1.52
  text "(6 PLCS) : MILL-MAX 2501-2" at 180.95,29.794 h2.54
  text "PCB : TOP" at 128.333,27.51 h1.27
  text "MH1-MH4" at 150.241,26.543 h2.54
  text "(3 PLCS) : MILL-MAX 2308-2" at 180.95,26.492 h2.54
  text "PCB : TOP" at 194.602,20.142 h2.54
  text "PCB" at 170.942,19.812 h1.27